# EAGLE board SparkFun_ENS160_BME280_Breakout-Panel (EAGLE 9.6.2), part 1 of 4
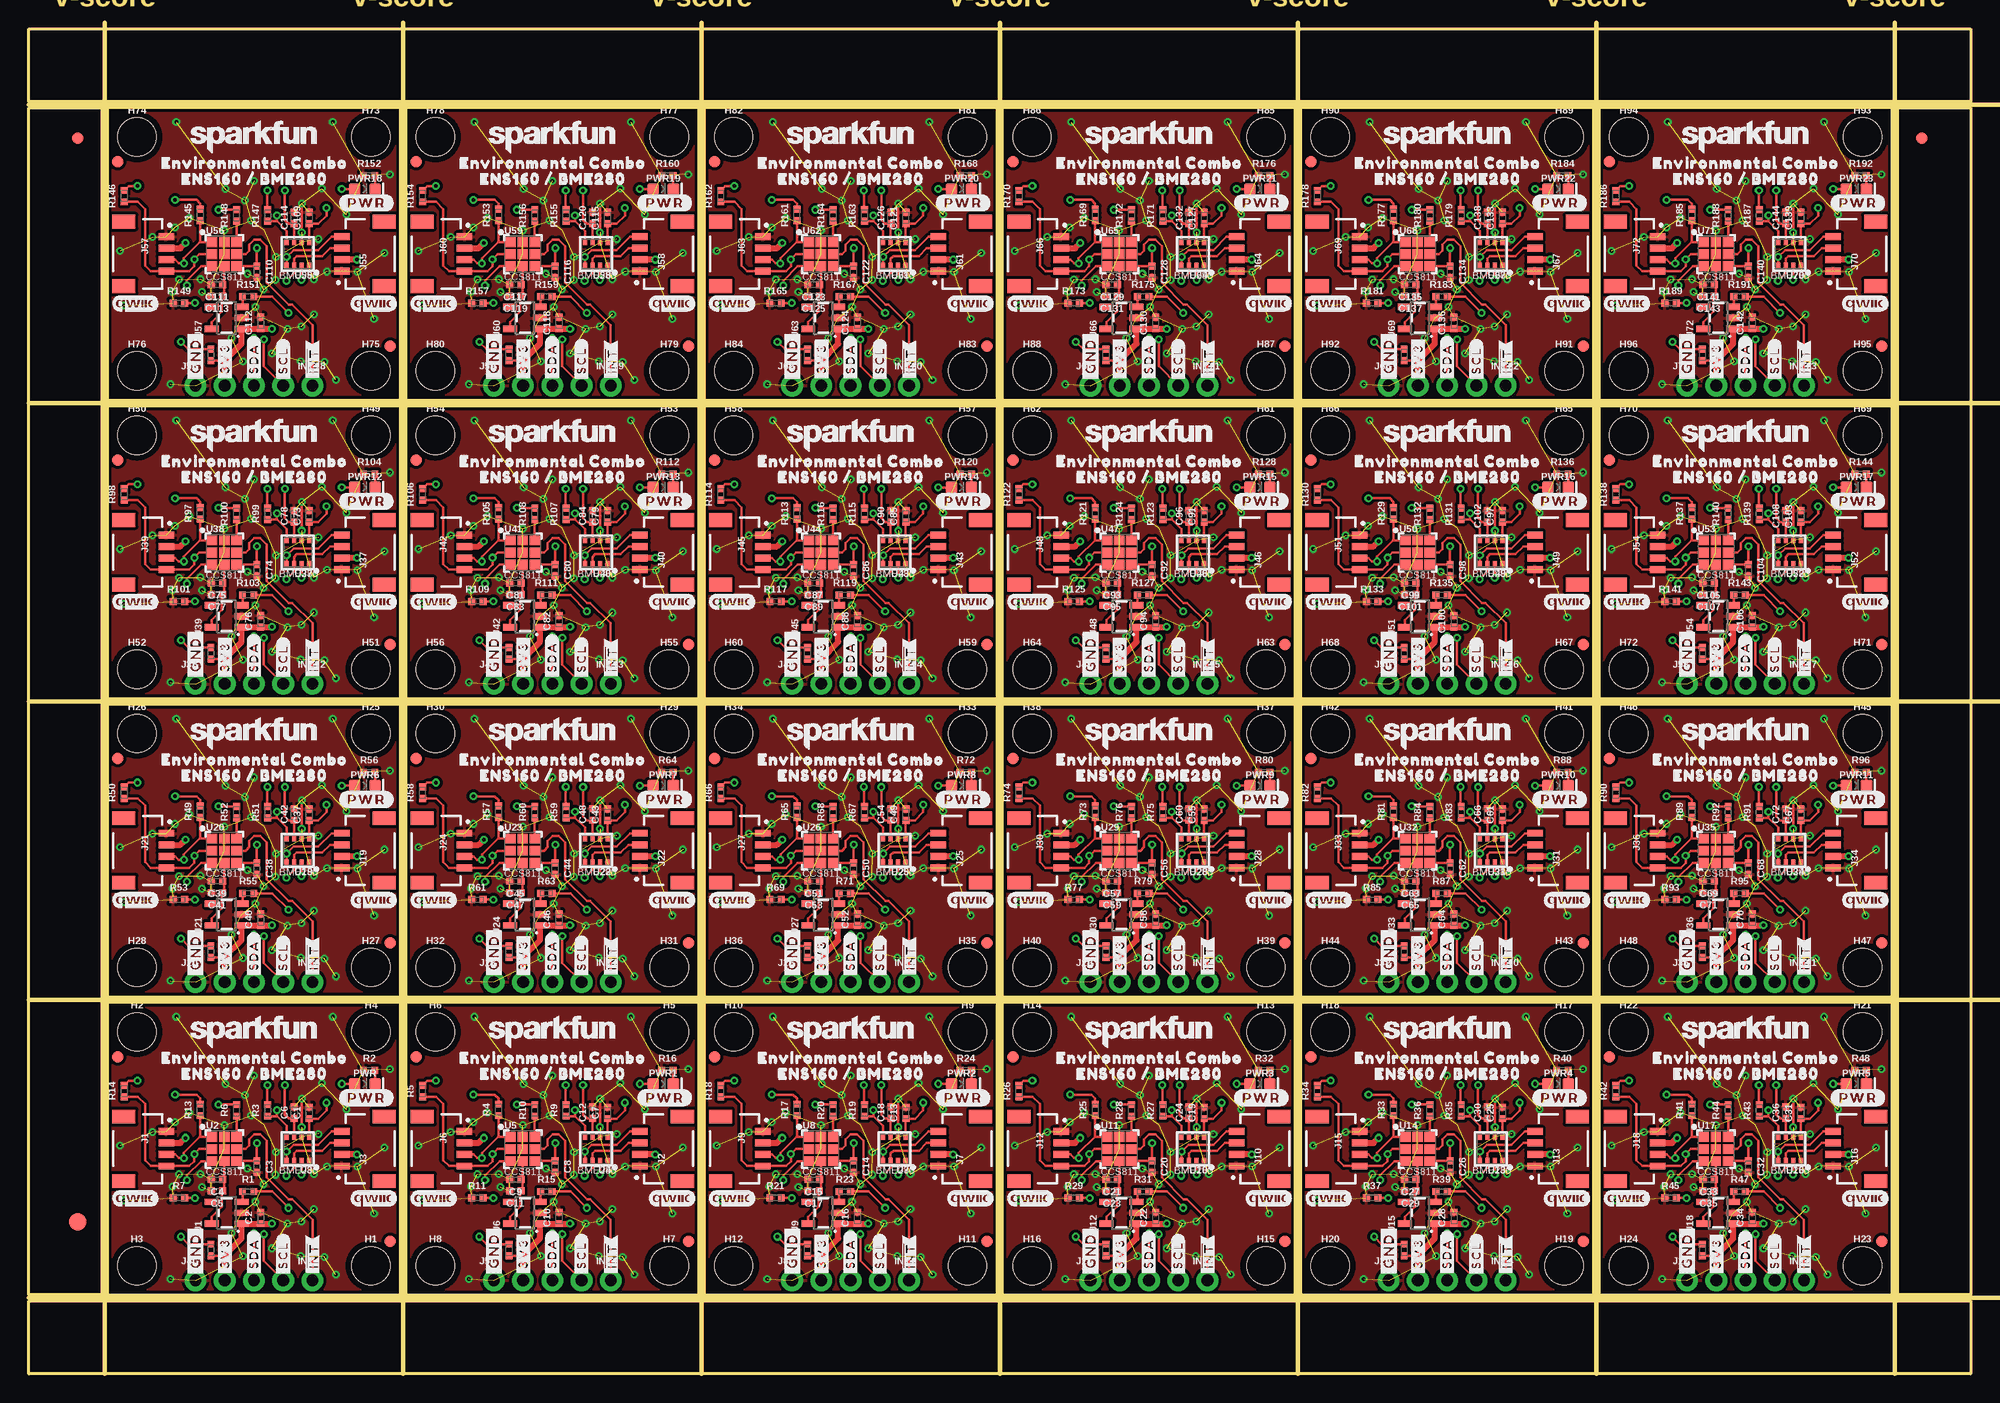
[diagram p0: board, top side]
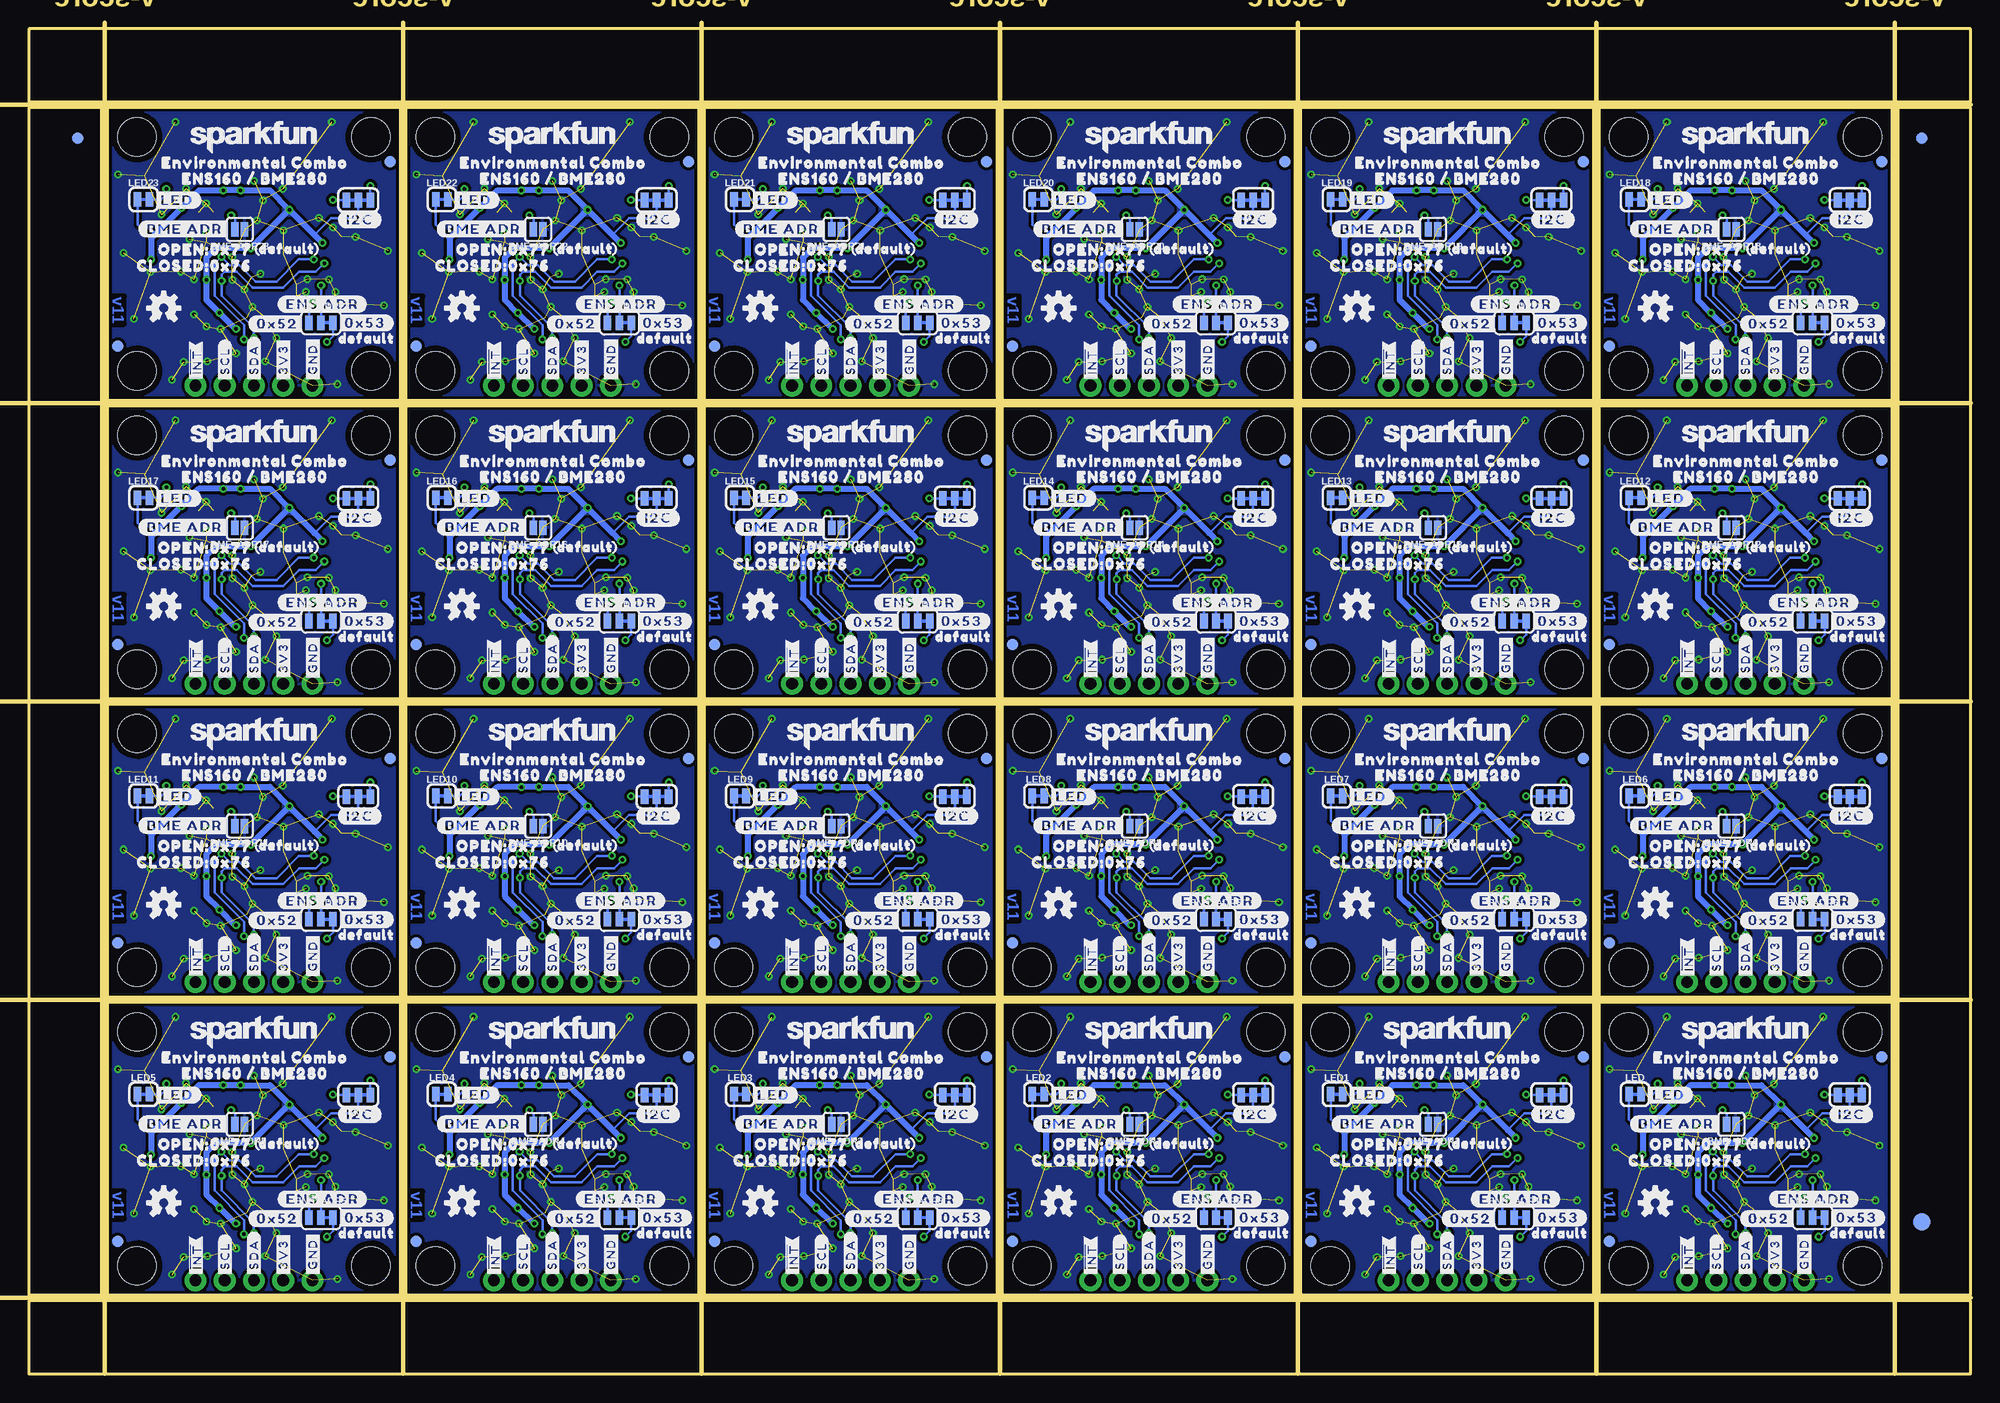
[diagram p1: board, bottom side, seen from below]

Size 168.66 x 116.84 mm. Coordinates in mm from the lower left corner, seen from the top.
Outline: 6.86,6.86 6.86,32.26 32.26,32.26 32.26,6.86 6.86,6.86
Outline: 32.77,6.86 32.77,32.26 58.17,32.26 58.17,6.86 32.77,6.86
Outline: 58.67,6.86 58.67,32.26 84.07,32.26 84.07,6.86 58.67,6.86
Outline: 84.58,6.86 84.58,32.26 109.98,32.26 109.98,6.86 84.58,6.86
Outline: 110.49,6.86 110.49,32.26 135.89,32.26 135.89,6.86 110.49,6.86
Outline: 136.4,6.86 136.4,32.26 161.8,32.26 161.8,6.86 136.4,6.86
Outline: 6.86,32.77 6.86,58.17 32.26,58.17 32.26,32.77 6.86,32.77
Outline: 32.77,32.77 32.77,58.17 58.17,58.17 58.17,32.77 32.77,32.77
Outline: 58.67,32.77 58.67,58.17 84.07,58.17 84.07,32.77 58.67,32.77
Outline: 84.58,32.77 84.58,58.17 109.98,58.17 109.98,32.77 84.58,32.77
Outline: 110.49,32.77 110.49,58.17 135.89,58.17 135.89,32.77 110.49,32.77
Outline: 136.4,32.77 136.4,58.17 161.8,58.17 161.8,32.77 136.4,32.77
Outline: 6.86,58.67 6.86,84.07 32.26,84.07 32.26,58.67 6.86,58.67
Outline: 32.77,58.67 32.77,84.07 58.17,84.07 58.17,58.67 32.77,58.67
Outline: 58.67,58.67 58.67,84.07 84.07,84.07 84.07,58.67 58.67,58.67
Outline: 84.58,58.67 84.58,84.07 109.98,84.07 109.98,58.67 84.58,58.67
Outline: 110.49,58.67 110.49,84.07 135.89,84.07 135.89,58.67 110.49,58.67
Outline: 136.4,58.67 136.4,84.07 161.8,84.07 161.8,58.67 136.4,58.67
Outline: 6.86,84.58 6.86,109.98 32.26,109.98 32.26,84.58 6.86,84.58
Outline: 32.77,84.58 32.77,109.98 58.17,109.98 58.17,84.58 32.77,84.58
Outline: 58.67,84.58 58.67,109.98 84.07,109.98 84.07,84.58 58.67,84.58
Outline: 84.58,84.58 84.58,109.98 109.98,109.98 109.98,84.58 84.58,84.58
Outline: 110.49,84.58 110.49,109.98 135.89,109.98 135.89,84.58 110.49,84.58
Outline: 136.4,84.58 136.4,109.98 161.8,109.98 161.8,84.58 136.4,84.58
Outline: 0,6.35 168.66,6.35 168.66,0 0,0 0,6.35
Outline: 162.31,109.98 168.66,109.98 168.66,6.86 162.31,6.86 162.31,109.98
Outline: 0,116.84 168.66,116.84 168.66,110.49 0,110.49 0,116.84
Outline: 0,109.98 6.35,109.98 6.35,6.86 0,6.86 0,109.98
Copper layers (1*16): Top 0.035mm / dielectric 1.5mm / Bottom 0.035mm
Design rules "SparkFun_ENS160_BME280_Breakout": minimum track width 7mil, minimum drill 0.3mm, track to track 7mil, track to pad 7mil, pad to pad 7mil, via to via 7mil, smd to smd 7mil, copper to edge 7mil, drill to drill 7mil, minimum pad ring 7mil, minimum via ring 7mil, stop-mask expansion 3mil, vias tented up to drill 25mil, thermal gap 10mil
Milling: 12 lines

## Footprints (pad centres in the part's own frame; a part is rotated, then mirrored left to right if it is on the bottom)
SMT-JUMPER_2_NO_SILK = smd 0.635 x 1.27: 1 -0.406,0; 2 0.406,0
0402-TIGHT = smd 0.6 x 0.6: 1 -0.5,0; 2 0.5,0
FIDUCIAL-1X2 = smd 1 x 1: 1 0,0
FIDUCIAL-1.5X3 = smd 1.5 x 1.5: 1 0,0
SMT-JUMPER_3_1-NC_TRACE_SILK = smd 0.66 x 1.27: 1 -1.041,0; 2 0,0; 3 1.041,0
STAND-OFF = hole 3.302: 0,0
SMT-JUMPER_3_2-NC_TRACE_SILK = smd 0.66 x 1.27: 1 -1.041,0; 2 0,0; 3 1.041,0
1X01_NO_SILK_STAND = drill 1.016 pad 1.88: 1 0,0
JST04_1MM_RA = smd 0.6 x 1.35: 1 -1.5,0; 2 -0.5,0; 3 0.5,0; 4 1.5,0 | smd 1.2 x 2: NC1 2.8,-3.675; NC2 -2.8,-3.675
1X04_NO_SILK = drill 1.016 pad 1.88: 1 0,0; 2 2.54,0; 3 5.08,0; 4 7.62,0
SMT-JUMPER_2_NC_TRACE_SILK = smd 0.66 x 1.27: 1 -0.521,0; 2 0.521,0
LED-0603 = smd 1 x 1: A -0.877,0; C 0.877,0
SOT23-5 = smd 0.55 x 1.2: 1 -0.95,-1.3; 2 0,-1.3; 3 0.95,-1.3; 4 0.95,1.3; 5 -0.95,1.3
LGA-9 = smd 0.9 x 0.85: P1 -1.085,1.03; P2 -1.085,-0.02; P3 -1.085,-1.07; P4 -0.035,-1.07; P5 1.015,-1.07; P6 1.015,-0.02; P7 1.015,1.03; P8 -0.035,1.03; P9 -0.035,-0.02
LGA-8-2.5X2.5 = smd 0.35 x 0.5: 1 -0.975,1.025; 2 -0.325,1.025; 3 0.325,1.025; 4 0.975,1.025; 5 0.975,-1.025; 6 0.325,-1.025; 7 -0.325,-1.025; 8 -0.975,-1.025

## Placement (x,y rotation side)
BME_ADR  [SMT-JUMPER_2_NO_SILK]  20.79,21.68 180 bottom
BME_ADR1  [SMT-JUMPER_2_NO_SILK]  46.7,21.68 180 bottom
BME_ADR2  [SMT-JUMPER_2_NO_SILK]  72.61,21.68 180 bottom
BME_ADR3  [SMT-JUMPER_2_NO_SILK]  98.52,21.68 180 bottom
BME_ADR4  [SMT-JUMPER_2_NO_SILK]  124.42,21.68 180 bottom
BME_ADR5  [SMT-JUMPER_2_NO_SILK]  150.33,21.68 180 bottom
BME_ADR6  [SMT-JUMPER_2_NO_SILK]  20.79,47.59 180 bottom
BME_ADR7  [SMT-JUMPER_2_NO_SILK]  46.7,47.59 180 bottom
BME_ADR8  [SMT-JUMPER_2_NO_SILK]  72.61,47.59 180 bottom
BME_ADR9  [SMT-JUMPER_2_NO_SILK]  98.52,47.59 180 bottom
BME_ADR10  [SMT-JUMPER_2_NO_SILK]  124.42,47.59 180 bottom
BME_ADR11  [SMT-JUMPER_2_NO_SILK]  150.33,47.59 180 bottom
BME_ADR12  [SMT-JUMPER_2_NO_SILK]  20.79,73.5 180 bottom
BME_ADR13  [SMT-JUMPER_2_NO_SILK]  46.7,73.5 180 bottom
BME_ADR14  [SMT-JUMPER_2_NO_SILK]  72.61,73.5 180 bottom
BME_ADR15  [SMT-JUMPER_2_NO_SILK]  98.52,73.5 180 bottom
BME_ADR16  [SMT-JUMPER_2_NO_SILK]  124.42,73.5 180 bottom
BME_ADR17  [SMT-JUMPER_2_NO_SILK]  150.33,73.5 180 bottom
BME_ADR18  [SMT-JUMPER_2_NO_SILK]  20.79,99.41 180 bottom
BME_ADR19  [SMT-JUMPER_2_NO_SILK]  46.7,99.41 180 bottom
BME_ADR20  [SMT-JUMPER_2_NO_SILK]  72.61,99.41 180 bottom
BME_ADR21  [SMT-JUMPER_2_NO_SILK]  98.52,99.41 180 bottom
BME_ADR22  [SMT-JUMPER_2_NO_SILK]  124.42,99.41 180 bottom
BME_ADR23  [SMT-JUMPER_2_NO_SILK]  150.33,99.41 180 bottom
C1  0.1uF  [0402-TIGHT]  24.36,22.68 90 top
C2  1.0uF  [0402-TIGHT]  20.15,13.56 90 top
C3  0.1uF  [0402-TIGHT]  19.81,18 270 top
C4  10uF  [0402-TIGHT]  16.34,16.89 180 top
C5  1.0uF  [0402-TIGHT]  16.34,15.89 180 top
C6  0.1uF  [0402-TIGHT]  23.05,22.69 90 top
C7  0.1uF  [0402-TIGHT]  50.27,22.68 90 top
C8  0.1uF  [0402-TIGHT]  45.72,18 270 top
C9  10uF  [0402-TIGHT]  42.25,16.89 180 top
C10  1.0uF  [0402-TIGHT]  46.06,13.56 90 top
C11  1.0uF  [0402-TIGHT]  42.25,15.89 180 top
C12  0.1uF  [0402-TIGHT]  48.96,22.69 90 top
C13  0.1uF  [0402-TIGHT]  76.17,22.68 90 top
C14  0.1uF  [0402-TIGHT]  71.63,18 270 top
C15  10uF  [0402-TIGHT]  68.16,16.89 180 top
C16  1.0uF  [0402-TIGHT]  71.97,13.56 90 top
C17  1.0uF  [0402-TIGHT]  68.16,15.89 180 top
C18  0.1uF  [0402-TIGHT]  74.87,22.69 90 top
C19  0.1uF  [0402-TIGHT]  102.08,22.68 90 top
C20  0.1uF  [0402-TIGHT]  97.54,18 270 top
C21  10uF  [0402-TIGHT]  94.07,16.89 180 top
C22  1.0uF  [0402-TIGHT]  97.88,13.56 90 top
C23  1.0uF  [0402-TIGHT]  94.07,15.89 180 top
C24  0.1uF  [0402-TIGHT]  100.78,22.69 90 top
C25  0.1uF  [0402-TIGHT]  127.99,22.68 90 top
C26  0.1uF  [0402-TIGHT]  123.44,18 270 top
C27  10uF  [0402-TIGHT]  119.98,16.89 180 top
C28  1.0uF  [0402-TIGHT]  123.78,13.56 90 top
C29  1.0uF  [0402-TIGHT]  119.97,15.89 180 top
C30  0.1uF  [0402-TIGHT]  126.69,22.69 90 top
C31  0.1uF  [0402-TIGHT]  153.9,22.68 90 top
C32  0.1uF  [0402-TIGHT]  149.35,18 270 top
C33  10uF  [0402-TIGHT]  145.88,16.89 180 top
C34  1.0uF  [0402-TIGHT]  149.69,13.56 90 top
C35  1.0uF  [0402-TIGHT]  145.88,15.89 180 top
C36  0.1uF  [0402-TIGHT]  152.59,22.69 90 top
C37  0.1uF  [0402-TIGHT]  24.36,48.59 90 top
C38  0.1uF  [0402-TIGHT]  19.81,43.9 270 top
C39  10uF  [0402-TIGHT]  16.34,42.8 180 top
C40  1.0uF  [0402-TIGHT]  20.15,39.47 90 top
C41  1.0uF  [0402-TIGHT]  16.34,41.8 180 top
C42  0.1uF  [0402-TIGHT]  23.05,48.6 90 top
C43  0.1uF  [0402-TIGHT]  50.27,48.59 90 top
C44  0.1uF  [0402-TIGHT]  45.72,43.9 270 top
C45  10uF  [0402-TIGHT]  42.25,42.8 180 top
C46  1.0uF  [0402-TIGHT]  46.06,39.47 90 top
C47  1.0uF  [0402-TIGHT]  42.25,41.8 180 top
C48  0.1uF  [0402-TIGHT]  48.96,48.6 90 top
C49  0.1uF  [0402-TIGHT]  76.17,48.59 90 top
C50  0.1uF  [0402-TIGHT]  71.63,43.9 270 top
C51  10uF  [0402-TIGHT]  68.16,42.8 180 top
C52  1.0uF  [0402-TIGHT]  71.97,39.47 90 top
C53  1.0uF  [0402-TIGHT]  68.16,41.8 180 top
C54  0.1uF  [0402-TIGHT]  74.87,48.6 90 top
C55  0.1uF  [0402-TIGHT]  102.08,48.59 90 top
C56  0.1uF  [0402-TIGHT]  97.54,43.9 270 top
C57  10uF  [0402-TIGHT]  94.07,42.8 180 top
C58  1.0uF  [0402-TIGHT]  97.88,39.47 90 top
C59  1.0uF  [0402-TIGHT]  94.07,41.8 180 top
C60  0.1uF  [0402-TIGHT]  100.78,48.6 90 top
C61  0.1uF  [0402-TIGHT]  127.99,48.59 90 top
C62  0.1uF  [0402-TIGHT]  123.44,43.9 270 top
C63  10uF  [0402-TIGHT]  119.98,42.8 180 top
C64  1.0uF  [0402-TIGHT]  123.78,39.47 90 top
C65  1.0uF  [0402-TIGHT]  119.97,41.8 180 top
C66  0.1uF  [0402-TIGHT]  126.69,48.6 90 top
C67  0.1uF  [0402-TIGHT]  153.9,48.59 90 top
C68  0.1uF  [0402-TIGHT]  149.35,43.9 270 top
C69  10uF  [0402-TIGHT]  145.88,42.8 180 top
C70  1.0uF  [0402-TIGHT]  149.69,39.47 90 top
C71  1.0uF  [0402-TIGHT]  145.88,41.8 180 top
C72  0.1uF  [0402-TIGHT]  152.59,48.6 90 top
C73  0.1uF  [0402-TIGHT]  24.36,74.49 90 top
C74  0.1uF  [0402-TIGHT]  19.81,69.81 270 top
C75  10uF  [0402-TIGHT]  16.34,68.71 180 top
C76  1.0uF  [0402-TIGHT]  20.15,65.38 90 top
C77  1.0uF  [0402-TIGHT]  16.34,67.71 180 top
C78  0.1uF  [0402-TIGHT]  23.05,74.51 90 top
C79  0.1uF  [0402-TIGHT]  50.27,74.49 90 top
C80  0.1uF  [0402-TIGHT]  45.72,69.81 270 top
C81  10uF  [0402-TIGHT]  42.25,68.71 180 top
C82  1.0uF  [0402-TIGHT]  46.06,65.38 90 top
C83  1.0uF  [0402-TIGHT]  42.25,67.71 180 top
C84  0.1uF  [0402-TIGHT]  48.96,74.51 90 top
C85  0.1uF  [0402-TIGHT]  76.17,74.49 90 top
C86  0.1uF  [0402-TIGHT]  71.63,69.81 270 top
C87  10uF  [0402-TIGHT]  68.16,68.71 180 top
C88  1.0uF  [0402-TIGHT]  71.97,65.38 90 top
C89  1.0uF  [0402-TIGHT]  68.16,67.71 180 top
C90  0.1uF  [0402-TIGHT]  74.87,74.51 90 top
C91  0.1uF  [0402-TIGHT]  102.08,74.49 90 top
C92  0.1uF  [0402-TIGHT]  97.54,69.81 270 top
C93  10uF  [0402-TIGHT]  94.07,68.71 180 top
C94  1.0uF  [0402-TIGHT]  97.88,65.38 90 top
C95  1.0uF  [0402-TIGHT]  94.07,67.71 180 top
C96  0.1uF  [0402-TIGHT]  100.78,74.51 90 top
C97  0.1uF  [0402-TIGHT]  127.99,74.49 90 top
C98  0.1uF  [0402-TIGHT]  123.44,69.81 270 top
C99  10uF  [0402-TIGHT]  119.98,68.71 180 top
C100  1.0uF  [0402-TIGHT]  123.78,65.38 90 top
C101  1.0uF  [0402-TIGHT]  119.97,67.71 180 top
C102  0.1uF  [0402-TIGHT]  126.69,74.51 90 top
C103  0.1uF  [0402-TIGHT]  153.9,74.49 90 top
C104  0.1uF  [0402-TIGHT]  149.35,69.81 270 top
C105  10uF  [0402-TIGHT]  145.88,68.71 180 top
C106  1.0uF  [0402-TIGHT]  149.69,65.38 90 top
C107  1.0uF  [0402-TIGHT]  145.88,67.71 180 top
C108  0.1uF  [0402-TIGHT]  152.59,74.51 90 top
C109  0.1uF  [0402-TIGHT]  24.36,100.4 90 top
C110  0.1uF  [0402-TIGHT]  19.81,95.72 270 top
C111  10uF  [0402-TIGHT]  16.34,94.62 180 top
C112  1.0uF  [0402-TIGHT]  20.15,91.28 90 top
C113  1.0uF  [0402-TIGHT]  16.34,93.62 180 top
C114  0.1uF  [0402-TIGHT]  23.05,100.41 90 top
C115  0.1uF  [0402-TIGHT]  50.27,100.4 90 top
C116  0.1uF  [0402-TIGHT]  45.72,95.72 270 top
C117  10uF  [0402-TIGHT]  42.25,94.62 180 top
C118  1.0uF  [0402-TIGHT]  46.06,91.28 90 top
C119  1.0uF  [0402-TIGHT]  42.25,93.62 180 top
C120  0.1uF  [0402-TIGHT]  48.96,100.41 90 top
C121  0.1uF  [0402-TIGHT]  76.17,100.4 90 top
C122  0.1uF  [0402-TIGHT]  71.63,95.72 270 top
C123  10uF  [0402-TIGHT]  68.16,94.62 180 top
C124  1.0uF  [0402-TIGHT]  71.97,91.28 90 top
C125  1.0uF  [0402-TIGHT]  68.16,93.62 180 top
C126  0.1uF  [0402-TIGHT]  74.87,100.41 90 top
C127  0.1uF  [0402-TIGHT]  102.08,100.4 90 top
C128  0.1uF  [0402-TIGHT]  97.54,95.72 270 top
C129  10uF  [0402-TIGHT]  94.07,94.62 180 top
C130  1.0uF  [0402-TIGHT]  97.88,91.28 90 top
C131  1.0uF  [0402-TIGHT]  94.07,93.62 180 top
C132  0.1uF  [0402-TIGHT]  100.78,100.41 90 top
C133  0.1uF  [0402-TIGHT]  127.99,100.4 90 top
C134  0.1uF  [0402-TIGHT]  123.44,95.72 270 top
C135  10uF  [0402-TIGHT]  119.98,94.62 180 top
C136  1.0uF  [0402-TIGHT]  123.78,91.28 90 top
C137  1.0uF  [0402-TIGHT]  119.97,93.62 180 top
C138  0.1uF  [0402-TIGHT]  126.69,100.41 90 top
C139  0.1uF  [0402-TIGHT]  153.9,100.4 90 top
C140  0.1uF  [0402-TIGHT]  149.35,95.72 270 top
C141  10uF  [0402-TIGHT]  145.88,94.62 180 top
C142  1.0uF  [0402-TIGHT]  149.69,91.28 90 top
C143  1.0uF  [0402-TIGHT]  145.88,93.62 180 top
C144  0.1uF  [0402-TIGHT]  152.59,100.41 90 top
E$1  [FIDUCIAL-1X2]  4.23,107.31 0 top
E$2  [FIDUCIAL-1X2]  4.23,107.31 0 bottom
E$3  [FIDUCIAL-1X2]  164.42,107.31 0 top
E$4  [FIDUCIAL-1X2]  164.42,107.31 0 bottom
E$5  [FIDUCIAL-1.5X3]  4.23,13.21 0 top
E$6  [FIDUCIAL-1.5X3]  4.23,13.21 0 bottom
ENS_ADR  JUMPER-SMT_3_1-NC_TRACE_SILK  [SMT-JUMPER_3_1-NC_TRACE_SILK]  13.73,13.58 0 bottom
ENS_ADR1  JUMPER-SMT_3_1-NC_TRACE_SILK  [SMT-JUMPER_3_1-NC_TRACE_SILK]  39.64,13.58 0 bottom
ENS_ADR2  JUMPER-SMT_3_1-NC_TRACE_SILK  [SMT-JUMPER_3_1-NC_TRACE_SILK]  65.55,13.58 0 bottom
ENS_ADR3  JUMPER-SMT_3_1-NC_TRACE_SILK  [SMT-JUMPER_3_1-NC_TRACE_SILK]  91.46,13.58 0 bottom
ENS_ADR4  JUMPER-SMT_3_1-NC_TRACE_SILK  [SMT-JUMPER_3_1-NC_TRACE_SILK]  117.37,13.58 0 bottom
ENS_ADR5  JUMPER-SMT_3_1-NC_TRACE_SILK  [SMT-JUMPER_3_1-NC_TRACE_SILK]  143.27,13.58 0 bottom
ENS_ADR6  JUMPER-SMT_3_1-NC_TRACE_SILK  [SMT-JUMPER_3_1-NC_TRACE_SILK]  13.73,39.49 0 bottom
ENS_ADR7  JUMPER-SMT_3_1-NC_TRACE_SILK  [SMT-JUMPER_3_1-NC_TRACE_SILK]  39.64,39.49 0 bottom
ENS_ADR8  JUMPER-SMT_3_1-NC_TRACE_SILK  [SMT-JUMPER_3_1-NC_TRACE_SILK]  65.55,39.49 0 bottom
ENS_ADR9  JUMPER-SMT_3_1-NC_TRACE_SILK  [SMT-JUMPER_3_1-NC_TRACE_SILK]  91.46,39.49 0 bottom
ENS_ADR10  JUMPER-SMT_3_1-NC_TRACE_SILK  [SMT-JUMPER_3_1-NC_TRACE_SILK]  117.37,39.49 0 bottom
ENS_ADR11  JUMPER-SMT_3_1-NC_TRACE_SILK  [SMT-JUMPER_3_1-NC_TRACE_SILK]  143.27,39.49 0 bottom
ENS_ADR12  JUMPER-SMT_3_1-NC_TRACE_SILK  [SMT-JUMPER_3_1-NC_TRACE_SILK]  13.73,65.4 0 bottom
ENS_ADR13  JUMPER-SMT_3_1-NC_TRACE_SILK  [SMT-JUMPER_3_1-NC_TRACE_SILK]  39.64,65.4 0 bottom
ENS_ADR14  JUMPER-SMT_3_1-NC_TRACE_SILK  [SMT-JUMPER_3_1-NC_TRACE_SILK]  65.55,65.4 0 bottom
ENS_ADR15  JUMPER-SMT_3_1-NC_TRACE_SILK  [SMT-JUMPER_3_1-NC_TRACE_SILK]  91.46,65.4 0 bottom
ENS_ADR16  JUMPER-SMT_3_1-NC_TRACE_SILK  [SMT-JUMPER_3_1-NC_TRACE_SILK]  117.37,65.4 0 bottom
ENS_ADR17  JUMPER-SMT_3_1-NC_TRACE_SILK  [SMT-JUMPER_3_1-NC_TRACE_SILK]  143.27,65.4 0 bottom
ENS_ADR18  JUMPER-SMT_3_1-NC_TRACE_SILK  [SMT-JUMPER_3_1-NC_TRACE_SILK]  13.73,91.31 0 bottom
ENS_ADR19  JUMPER-SMT_3_1-NC_TRACE_SILK  [SMT-JUMPER_3_1-NC_TRACE_SILK]  39.64,91.31 0 bottom
ENS_ADR20  JUMPER-SMT_3_1-NC_TRACE_SILK  [SMT-JUMPER_3_1-NC_TRACE_SILK]  65.55,91.31 0 bottom
ENS_ADR21  JUMPER-SMT_3_1-NC_TRACE_SILK  [SMT-JUMPER_3_1-NC_TRACE_SILK]  91.46,91.31 0 bottom
ENS_ADR22  JUMPER-SMT_3_1-NC_TRACE_SILK  [SMT-JUMPER_3_1-NC_TRACE_SILK]  117.37,91.31 0 bottom
ENS_ADR23  JUMPER-SMT_3_1-NC_TRACE_SILK  [SMT-JUMPER_3_1-NC_TRACE_SILK]  143.27,91.31 0 bottom
FD1  FIDUCIAL1X2  [FIDUCIAL-1X2]  7.74,27.55 0 top
FD2  FIDUCIAL1X2  [FIDUCIAL-1X2]  31.39,11.54 0 top
FD3  FIDUCIAL1X2  [FIDUCIAL-1X2]  31.39,11.54 0 bottom
FD4  FIDUCIAL1X2  [FIDUCIAL-1X2]  7.74,27.55 0 bottom
FD5  FIDUCIAL1X2  [FIDUCIAL-1X2]  33.65,27.55 0 top
FD6  FIDUCIAL1X2  [FIDUCIAL-1X2]  57.3,11.54 0 top
FD7  FIDUCIAL1X2  [FIDUCIAL-1X2]  57.3,11.54 0 bottom
FD8  FIDUCIAL1X2  [FIDUCIAL-1X2]  33.65,27.55 0 bottom
FD9  FIDUCIAL1X2  [FIDUCIAL-1X2]  59.56,27.55 0 top
FD10  FIDUCIAL1X2  [FIDUCIAL-1X2]  83.21,11.54 0 top
FD11  FIDUCIAL1X2  [FIDUCIAL-1X2]  83.21,11.54 0 bottom
FD12  FIDUCIAL1X2  [FIDUCIAL-1X2]  59.56,27.55 0 bottom
FD13  FIDUCIAL1X2  [FIDUCIAL-1X2]  85.47,27.55 0 top
FD14  FIDUCIAL1X2  [FIDUCIAL-1X2]  109.12,11.54 0 top
FD15  FIDUCIAL1X2  [FIDUCIAL-1X2]  109.12,11.54 0 bottom
FD16  FIDUCIAL1X2  [FIDUCIAL-1X2]  85.47,27.55 0 bottom
FD17  FIDUCIAL1X2  [FIDUCIAL-1X2]  111.37,27.55 0 top
FD18  FIDUCIAL1X2  [FIDUCIAL-1X2]  135.02,11.54 0 top
FD19  FIDUCIAL1X2  [FIDUCIAL-1X2]  135.02,11.54 0 bottom
FD20  FIDUCIAL1X2  [FIDUCIAL-1X2]  111.37,27.55 0 bottom
FD21  FIDUCIAL1X2  [FIDUCIAL-1X2]  137.28,27.55 0 top
FD22  FIDUCIAL1X2  [FIDUCIAL-1X2]  160.93,11.54 0 top
FD23  FIDUCIAL1X2  [FIDUCIAL-1X2]  160.93,11.54 0 bottom
FD24  FIDUCIAL1X2  [FIDUCIAL-1X2]  137.28,27.55 0 bottom
FD25  FIDUCIAL1X2  [FIDUCIAL-1X2]  7.74,53.46 0 top
FD26  FIDUCIAL1X2  [FIDUCIAL-1X2]  31.39,37.45 0 top
FD27  FIDUCIAL1X2  [FIDUCIAL-1X2]  31.39,37.45 0 bottom
FD28  FIDUCIAL1X2  [FIDUCIAL-1X2]  7.74,53.46 0 bottom
FD29  FIDUCIAL1X2  [FIDUCIAL-1X2]  33.65,53.46 0 top
FD30  FIDUCIAL1X2  [FIDUCIAL-1X2]  57.3,37.45 0 top
FD31  FIDUCIAL1X2  [FIDUCIAL-1X2]  57.3,37.45 0 bottom
FD32  FIDUCIAL1X2  [FIDUCIAL-1X2]  33.65,53.46 0 bottom
FD33  FIDUCIAL1X2  [FIDUCIAL-1X2]  59.56,53.46 0 top
FD34  FIDUCIAL1X2  [FIDUCIAL-1X2]  83.21,37.45 0 top
FD35  FIDUCIAL1X2  [FIDUCIAL-1X2]  83.21,37.45 0 bottom
FD36  FIDUCIAL1X2  [FIDUCIAL-1X2]  59.56,53.46 0 bottom
FD37  FIDUCIAL1X2  [FIDUCIAL-1X2]  85.47,53.46 0 top
FD38  FIDUCIAL1X2  [FIDUCIAL-1X2]  109.12,37.45 0 top
FD39  FIDUCIAL1X2  [FIDUCIAL-1X2]  109.12,37.45 0 bottom
FD40  FIDUCIAL1X2  [FIDUCIAL-1X2]  85.47,53.46 0 bottom
FD41  FIDUCIAL1X2  [FIDUCIAL-1X2]  111.37,53.46 0 top
FD42  FIDUCIAL1X2  [FIDUCIAL-1X2]  135.02,37.45 0 top
FD43  FIDUCIAL1X2  [FIDUCIAL-1X2]  135.02,37.45 0 bottom
FD44  FIDUCIAL1X2  [FIDUCIAL-1X2]  111.37,53.46 0 bottom
FD45  FIDUCIAL1X2  [FIDUCIAL-1X2]  137.28,53.46 0 top
FD46  FIDUCIAL1X2  [FIDUCIAL-1X2]  160.93,37.45 0 top
FD47  FIDUCIAL1X2  [FIDUCIAL-1X2]  160.93,37.45 0 bottom
FD48  FIDUCIAL1X2  [FIDUCIAL-1X2]  137.28,53.46 0 bottom
FD49  FIDUCIAL1X2  [FIDUCIAL-1X2]  7.74,79.37 0 top
FD50  FIDUCIAL1X2  [FIDUCIAL-1X2]  31.39,63.36 0 top
FD51  FIDUCIAL1X2  [FIDUCIAL-1X2]  31.39,63.36 0 bottom
FD52  FIDUCIAL1X2  [FIDUCIAL-1X2]  7.74,79.37 0 bottom
FD53  FIDUCIAL1X2  [FIDUCIAL-1X2]  33.65,79.37 0 top
FD54  FIDUCIAL1X2  [FIDUCIAL-1X2]  57.3,63.36 0 top
FD55  FIDUCIAL1X2  [FIDUCIAL-1X2]  57.3,63.36 0 bottom
FD56  FIDUCIAL1X2  [FIDUCIAL-1X2]  33.65,79.37 0 bottom
FD57  FIDUCIAL1X2  [FIDUCIAL-1X2]  59.56,79.37 0 top
FD58  FIDUCIAL1X2  [FIDUCIAL-1X2]  83.21,63.36 0 top
FD59  FIDUCIAL1X2  [FIDUCIAL-1X2]  83.21,63.36 0 bottom
FD60  FIDUCIAL1X2  [FIDUCIAL-1X2]  59.56,79.37 0 bottom
FD61  FIDUCIAL1X2  [FIDUCIAL-1X2]  85.47,79.37 0 top
FD62  FIDUCIAL1X2  [FIDUCIAL-1X2]  109.12,63.36 0 top
FD63  FIDUCIAL1X2  [FIDUCIAL-1X2]  109.12,63.36 0 bottom
FD64  FIDUCIAL1X2  [FIDUCIAL-1X2]  85.47,79.37 0 bottom
FD65  FIDUCIAL1X2  [FIDUCIAL-1X2]  111.37,79.37 0 top
FD66  FIDUCIAL1X2  [FIDUCIAL-1X2]  135.02,63.36 0 top
FD67  FIDUCIAL1X2  [FIDUCIAL-1X2]  135.02,63.36 0 bottom
FD68  FIDUCIAL1X2  [FIDUCIAL-1X2]  111.37,79.37 0 bottom
FD69  FIDUCIAL1X2  [FIDUCIAL-1X2]  137.28,79.37 0 top
FD70  FIDUCIAL1X2  [FIDUCIAL-1X2]  160.93,63.36 0 top
FD71  FIDUCIAL1X2  [FIDUCIAL-1X2]  160.93,63.36 0 bottom
FD72  FIDUCIAL1X2  [FIDUCIAL-1X2]  137.28,79.37 0 bottom
FD73  FIDUCIAL1X2  [FIDUCIAL-1X2]  7.74,105.28 0 top
FD74  FIDUCIAL1X2  [FIDUCIAL-1X2]  31.39,89.26 0 top
FD75  FIDUCIAL1X2  [FIDUCIAL-1X2]  31.39,89.26 0 bottom
FD76  FIDUCIAL1X2  [FIDUCIAL-1X2]  7.74,105.28 0 bottom
FD77  FIDUCIAL1X2  [FIDUCIAL-1X2]  33.65,105.28 0 top
FD78  FIDUCIAL1X2  [FIDUCIAL-1X2]  57.3,89.26 0 top
FD79  FIDUCIAL1X2  [FIDUCIAL-1X2]  57.3,89.26 0 bottom
FD80  FIDUCIAL1X2  [FIDUCIAL-1X2]  33.65,105.28 0 bottom
FD81  FIDUCIAL1X2  [FIDUCIAL-1X2]  59.56,105.28 0 top
FD82  FIDUCIAL1X2  [FIDUCIAL-1X2]  83.21,89.26 0 top
FD83  FIDUCIAL1X2  [FIDUCIAL-1X2]  83.21,89.26 0 bottom
FD84  FIDUCIAL1X2  [FIDUCIAL-1X2]  59.56,105.28 0 bottom
FD85  FIDUCIAL1X2  [FIDUCIAL-1X2]  85.47,105.28 0 top
FD86  FIDUCIAL1X2  [FIDUCIAL-1X2]  109.12,89.26 0 top
FD87  FIDUCIAL1X2  [FIDUCIAL-1X2]  109.12,89.26 0 bottom
FD88  FIDUCIAL1X2  [FIDUCIAL-1X2]  85.47,105.28 0 bottom
FD89  FIDUCIAL1X2  [FIDUCIAL-1X2]  111.37,105.28 0 top
FD90  FIDUCIAL1X2  [FIDUCIAL-1X2]  135.02,89.26 0 top
FD91  FIDUCIAL1X2  [FIDUCIAL-1X2]  135.02,89.26 0 bottom
FD92  FIDUCIAL1X2  [FIDUCIAL-1X2]  111.37,105.28 0 bottom
FD93  FIDUCIAL1X2  [FIDUCIAL-1X2]  137.28,105.28 0 top
FD94  FIDUCIAL1X2  [FIDUCIAL-1X2]  160.93,89.26 0 top
FD95  FIDUCIAL1X2  [FIDUCIAL-1X2]  160.93,89.26 0 bottom
FD96  FIDUCIAL1X2  [FIDUCIAL-1X2]  137.28,105.28 0 bottom
H1  STAND-OFF  [STAND-OFF]  29.72,9.4 0 top
H2  STAND-OFF  [STAND-OFF]  9.4,29.72 0 top
H3  STAND-OFF  [STAND-OFF]  9.4,9.4 0 top
H4  STAND-OFF  [STAND-OFF]  29.72,29.72 0 top
H5  STAND-OFF  [STAND-OFF]  55.63,29.72 0 top
H6  STAND-OFF  [STAND-OFF]  35.31,29.72 0 top
H7  STAND-OFF  [STAND-OFF]  55.63,9.4 0 top
H8  STAND-OFF  [STAND-OFF]  35.31,9.4 0 top
H9  STAND-OFF  [STAND-OFF]  81.53,29.72 0 top
H10  STAND-OFF  [STAND-OFF]  61.21,29.72 0 top
H11  STAND-OFF  [STAND-OFF]  81.53,9.4 0 top
H12  STAND-OFF  [STAND-OFF]  61.21,9.4 0 top
H13  STAND-OFF  [STAND-OFF]  107.44,29.72 0 top
H14  STAND-OFF  [STAND-OFF]  87.12,29.72 0 top
H15  STAND-OFF  [STAND-OFF]  107.44,9.4 0 top
H16  STAND-OFF  [STAND-OFF]  87.12,9.4 0 top
H17  STAND-OFF  [STAND-OFF]  133.35,29.72 0 top
H18  STAND-OFF  [STAND-OFF]  113.03,29.72 0 top
H19  STAND-OFF  [STAND-OFF]  133.35,9.4 0 top
H20  STAND-OFF  [STAND-OFF]  113.03,9.4 0 top
H21  STAND-OFF  [STAND-OFF]  159.26,29.72 0 top
H22  STAND-OFF  [STAND-OFF]  138.94,29.72 0 top
H23  STAND-OFF  [STAND-OFF]  159.26,9.4 0 top
H24  STAND-OFF  [STAND-OFF]  138.94,9.4 0 top
H25  STAND-OFF  [STAND-OFF]  29.72,55.63 0 top
H26  STAND-OFF  [STAND-OFF]  9.4,55.63 0 top
H27  STAND-OFF  [STAND-OFF]  29.72,35.31 0 top
H28  STAND-OFF  [STAND-OFF]  9.4,35.31 0 top
H29  STAND-OFF  [STAND-OFF]  55.63,55.63 0 top
H30  STAND-OFF  [STAND-OFF]  35.31,55.63 0 top
H31  STAND-OFF  [STAND-OFF]  55.63,35.31 0 top
H32  STAND-OFF  [STAND-OFF]  35.31,35.31 0 top
H33  STAND-OFF  [STAND-OFF]  81.53,55.63 0 top
H34  STAND-OFF  [STAND-OFF]  61.21,55.63 0 top
H35  STAND-OFF  [STAND-OFF]  81.53,35.31 0 top
H36  STAND-OFF  [STAND-OFF]  61.21,35.31 0 top
H37  STAND-OFF  [STAND-OFF]  107.44,55.63 0 top
H38  STAND-OFF  [STAND-OFF]  87.12,55.63 0 top
H39  STAND-OFF  [STAND-OFF]  107.44,35.31 0 top
H40  STAND-OFF  [STAND-OFF]  87.12,35.31 0 top
H41  STAND-OFF  [STAND-OFF]  133.35,55.63 0 top
H42  STAND-OFF  [STAND-OFF]  113.03,55.63 0 top
H43  STAND-OFF  [STAND-OFF]  133.35,35.31 0 top
H44  STAND-OFF  [STAND-OFF]  113.03,35.31 0 top
H45  STAND-OFF  [STAND-OFF]  159.26,55.63 0 top
H46  STAND-OFF  [STAND-OFF]  138.94,55.63 0 top
H47  STAND-OFF  [STAND-OFF]  159.26,35.31 0 top
H48  STAND-OFF  [STAND-OFF]  138.94,35.31 0 top
H49  STAND-OFF  [STAND-OFF]  29.72,81.53 0 top
H50  STAND-OFF  [STAND-OFF]  9.4,81.53 0 top
H51  STAND-OFF  [STAND-OFF]  29.72,61.21 0 top
H52  STAND-OFF  [STAND-OFF]  9.4,61.21 0 top
H53  STAND-OFF  [STAND-OFF]  55.63,81.53 0 top
H54  STAND-OFF  [STAND-OFF]  35.31,81.53 0 top
H55  STAND-OFF  [STAND-OFF]  55.63,61.21 0 top
H56  STAND-OFF  [STAND-OFF]  35.31,61.21 0 top
H57  STAND-OFF  [STAND-OFF]  81.53,81.53 0 top
H58  STAND-OFF  [STAND-OFF]  61.21,81.53 0 top
H59  STAND-OFF  [STAND-OFF]  81.53,61.21 0 top
H60  STAND-OFF  [STAND-OFF]  61.21,61.21 0 top
H61  STAND-OFF  [STAND-OFF]  107.44,81.53 0 top
H62  STAND-OFF  [STAND-OFF]  87.12,81.53 0 top
H63  STAND-OFF  [STAND-OFF]  107.44,61.21 0 top
H64  STAND-OFF  [STAND-OFF]  87.12,61.21 0 top
H65  STAND-OFF  [STAND-OFF]  133.35,81.53 0 top
H66  STAND-OFF  [STAND-OFF]  113.03,81.53 0 top
H67  STAND-OFF  [STAND-OFF]  133.35,61.21 0 top
H68  STAND-OFF  [STAND-OFF]  113.03,61.21 0 top
H69  STAND-OFF  [STAND-OFF]  159.26,81.53 0 top
H70  STAND-OFF  [STAND-OFF]  138.94,81.53 0 top
H71  STAND-OFF  [STAND-OFF]  159.26,61.21 0 top
H72  STAND-OFF  [STAND-OFF]  138.94,61.21 0 top
H73  STAND-OFF  [STAND-OFF]  29.72,107.44 0 top
H74  STAND-OFF  [STAND-OFF]  9.4,107.44 0 top
H75  STAND-OFF  [STAND-OFF]  29.72,87.12 0 top
H76  STAND-OFF  [STAND-OFF]  9.4,87.12 0 top
H77  STAND-OFF  [STAND-OFF]  55.63,107.44 0 top
H78  STAND-OFF  [STAND-OFF]  35.31,107.44 0 top
H79  STAND-OFF  [STAND-OFF]  55.63,87.12 0 top
H80  STAND-OFF  [STAND-OFF]  35.31,87.12 0 top
H81  STAND-OFF  [STAND-OFF]  81.53,107.44 0 top
H82  STAND-OFF  [STAND-OFF]  61.21,107.44 0 top
H83  STAND-OFF  [STAND-OFF]  81.53,87.12 0 top
H84  STAND-OFF  [STAND-OFF]  61.21,87.12 0 top
H85  STAND-OFF  [STAND-OFF]  107.44,107.44 0 top
H86  STAND-OFF  [STAND-OFF]  87.12,107.44 0 top
H87  STAND-OFF  [STAND-OFF]  107.44,87.12 0 top
H88  STAND-OFF  [STAND-OFF]  87.12,87.12 0 top
H89  STAND-OFF  [STAND-OFF]  133.35,107.44 0 top
H90  STAND-OFF  [STAND-OFF]  113.03,107.44 0 top
H91  STAND-OFF  [STAND-OFF]  133.35,87.12 0 top
H92  STAND-OFF  [STAND-OFF]  113.03,87.12 0 top
H93  STAND-OFF  [STAND-OFF]  159.26,107.44 0 top
H94  STAND-OFF  [STAND-OFF]  138.94,107.44 0 top
H95  STAND-OFF  [STAND-OFF]  159.26,87.12 0 top
H96  STAND-OFF  [STAND-OFF]  138.94,87.12 0 top
I2C  [SMT-JUMPER_3_2-NC_TRACE_SILK]  10.5,24.23 180 bottom
I2C1  [SMT-JUMPER_3_2-NC_TRACE_SILK]  36.41,24.23 180 bottom
I2C2  [SMT-JUMPER_3_2-NC_TRACE_SILK]  62.32,24.23 180 bottom
I2C3  [SMT-JUMPER_3_2-NC_TRACE_SILK]  88.23,24.23 180 bottom
I2C4  [SMT-JUMPER_3_2-NC_TRACE_SILK]  114.13,24.23 180 bottom
I2C5  [SMT-JUMPER_3_2-NC_TRACE_SILK]  140.04,24.23 180 bottom
I2C6  [SMT-JUMPER_3_2-NC_TRACE_SILK]  10.5,50.14 180 bottom
I2C7  [SMT-JUMPER_3_2-NC_TRACE_SILK]  36.41,50.14 180 bottom
I2C8  [SMT-JUMPER_3_2-NC_TRACE_SILK]  62.32,50.14 180 bottom
I2C9  [SMT-JUMPER_3_2-NC_TRACE_SILK]  88.23,50.14 180 bottom
I2C10  [SMT-JUMPER_3_2-NC_TRACE_SILK]  114.13,50.14 180 bottom
I2C11  [SMT-JUMPER_3_2-NC_TRACE_SILK]  140.04,50.14 180 bottom
I2C12  [SMT-JUMPER_3_2-NC_TRACE_SILK]  10.5,76.05 180 bottom
I2C13  [SMT-JUMPER_3_2-NC_TRACE_SILK]  36.41,76.05 180 bottom
I2C14  [SMT-JUMPER_3_2-NC_TRACE_SILK]  62.32,76.05 180 bottom
I2C15  [SMT-JUMPER_3_2-NC_TRACE_SILK]  88.23,76.05 180 bottom
I2C16  [SMT-JUMPER_3_2-NC_TRACE_SILK]  114.13,76.05 180 bottom
I2C17  [SMT-JUMPER_3_2-NC_TRACE_SILK]  140.04,76.05 180 bottom
I2C18  [SMT-JUMPER_3_2-NC_TRACE_SILK]  10.5,101.96 180 bottom
I2C19  [SMT-JUMPER_3_2-NC_TRACE_SILK]  36.41,101.96 180 bottom
I2C20  [SMT-JUMPER_3_2-NC_TRACE_SILK]  62.32,101.96 180 bottom
I2C21  [SMT-JUMPER_3_2-NC_TRACE_SILK]  88.23,101.96 180 bottom
I2C22  [SMT-JUMPER_3_2-NC_TRACE_SILK]  114.13,101.96 180 bottom
I2C23  [SMT-JUMPER_3_2-NC_TRACE_SILK]  140.04,101.96 180 bottom
INT  [1X01_NO_SILK_STAND]  24.64,8.13 0 top
INT1  [1X01_NO_SILK_STAND]  50.55,8.13 0 top
INT2  [1X01_NO_SILK_STAND]  76.45,8.13 0 top
INT3  [1X01_NO_SILK_STAND]  102.36,8.13 0 top
INT4  [1X01_NO_SILK_STAND]  128.27,8.13 0 top
INT5  [1X01_NO_SILK_STAND]  154.18,8.13 0 top
INT6  [1X01_NO_SILK_STAND]  24.64,34.04 0 top
INT7  [1X01_NO_SILK_STAND]  50.55,34.04 0 top
INT8  [1X01_NO_SILK_STAND]  76.45,34.04 0 top
INT9  [1X01_NO_SILK_STAND]  102.36,34.04 0 top
INT10  [1X01_NO_SILK_STAND]  128.27,34.04 0 top
INT11  [1X01_NO_SILK_STAND]  154.18,34.04 0 top
INT12  [1X01_NO_SILK_STAND]  24.64,59.94 0 top
INT13  [1X01_NO_SILK_STAND]  50.55,59.94 0 top
INT14  [1X01_NO_SILK_STAND]  76.45,59.94 0 top
INT15  [1X01_NO_SILK_STAND]  102.36,59.94 0 top
INT16  [1X01_NO_SILK_STAND]  128.27,59.94 0 top
INT17  [1X01_NO_SILK_STAND]  154.18,59.94 0 top
INT18  [1X01_NO_SILK_STAND]  24.64,85.85 0 top
INT19  [1X01_NO_SILK_STAND]  50.55,85.85 0 top
INT20  [1X01_NO_SILK_STAND]  76.45,85.85 0 top
INT21  [1X01_NO_SILK_STAND]  102.36,85.85 0 top
INT22  [1X01_NO_SILK_STAND]  128.27,85.85 0 top
INT23  [1X01_NO_SILK_STAND]  154.18,85.85 0 top
J1  Qwiic Right Angle  [JST04_1MM_RA]  11.94,19.56 270 top
J2  Qwiic Right Angle  [JST04_1MM_RA]  53.09,19.56 90 top
J3  Qwiic Right Angle  [JST04_1MM_RA]  27.18,19.56 90 top
J4  PTH  [1X04_NO_SILK]  14.48,8.13 0 top
J5  PTH  [1X04_NO_SILK]  40.39,8.13 0 top
J6  Qwiic Right Angle  [JST04_1MM_RA]  37.85,19.56 270 top
J7  Qwiic Right Angle  [JST04_1MM_RA]  78.99,19.56 90 top
J8  PTH  [1X04_NO_SILK]  66.29,8.13 0 top
J9  Qwiic Right Angle  [JST04_1MM_RA]  63.75,19.56 270 top
J10  Qwiic Right Angle  [JST04_1MM_RA]  104.9,19.56 90 top
J11  PTH  [1X04_NO_SILK]  92.2,8.13 0 top
J12  Qwiic Right Angle  [JST04_1MM_RA]  89.66,19.56 270 top
J13  Qwiic Right Angle  [JST04_1MM_RA]  130.81,19.56 90 top
J14  PTH  [1X04_NO_SILK]  118.11,8.13 0 top
J15  Qwiic Right Angle  [JST04_1MM_RA]  115.57,19.56 270 top
J16  Qwiic Right Angle  [JST04_1MM_RA]  156.72,19.56 90 top
J17  PTH  [1X04_NO_SILK]  144.02,8.13 0 top
J18  Qwiic Right Angle  [JST04_1MM_RA]  141.48,19.56 270 top
J19  Qwiic Right Angle  [JST04_1MM_RA]  27.18,45.47 90 top
J20  PTH  [1X04_NO_SILK]  14.48,34.04 0 top
J21  Qwiic Right Angle  [JST04_1MM_RA]  11.94,45.47 270 top
J22  Qwiic Right Angle  [JST04_1MM_RA]  53.09,45.47 90 top
J23  PTH  [1X04_NO_SILK]  40.39,34.04 0 top
J24  Qwiic Right Angle  [JST04_1MM_RA]  37.85,45.47 270 top
J25  Qwiic Right Angle  [JST04_1MM_RA]  78.99,45.47 90 top
J26  PTH  [1X04_NO_SILK]  66.29,34.04 0 top
J27  Qwiic Right Angle  [JST04_1MM_RA]  63.75,45.47 270 top
J28  Qwiic Right Angle  [JST04_1MM_RA]  104.9,45.47 90 top
J29  PTH  [1X04_NO_SILK]  92.2,34.04 0 top
J30  Qwiic Right Angle  [JST04_1MM_RA]  89.66,45.47 270 top
J31  Qwiic Right Angle  [JST04_1MM_RA]  130.81,45.47 90 top
J32  PTH  [1X04_NO_SILK]  118.11,34.04 0 top
J33  Qwiic Right Angle  [JST04_1MM_RA]  115.57,45.47 270 top
J34  Qwiic Right Angle  [JST04_1MM_RA]  156.72,45.47 90 top
J35  PTH  [1X04_NO_SILK]  144.02,34.04 0 top
J36  Qwiic Right Angle  [JST04_1MM_RA]  141.48,45.47 270 top
J37  Qwiic Right Angle  [JST04_1MM_RA]  27.18,71.37 90 top
J38  PTH  [1X04_NO_SILK]  14.48,59.94 0 top
J39  Qwiic Right Angle  [JST04_1MM_RA]  11.94,71.37 270 top
J40  Qwiic Right Angle  [JST04_1MM_RA]  53.09,71.37 90 top
J41  PTH  [1X04_NO_SILK]  40.39,59.94 0 top
J42  Qwiic Right Angle  [JST04_1MM_RA]  37.85,71.37 270 top
J43  Qwiic Right Angle  [JST04_1MM_RA]  78.99,71.37 90 top
J44  PTH  [1X04_NO_SILK]  66.29,59.94 0 top
J45  Qwiic Right Angle  [JST04_1MM_RA]  63.75,71.37 270 top
J46  Qwiic Right Angle  [JST04_1MM_RA]  104.9,71.37 90 top
J47  PTH  [1X04_NO_SILK]  92.2,59.94 0 top
J48  Qwiic Right Angle  [JST04_1MM_RA]  89.66,71.37 270 top
J49  Qwiic Right Angle  [JST04_1MM_RA]  130.81,71.37 90 top
J50  PTH  [1X04_NO_SILK]  118.11,59.94 0 top
J51  Qwiic Right Angle  [JST04_1MM_RA]  115.57,71.37 270 top
J52  Qwiic Right Angle  [JST04_1MM_RA]  156.72,71.37 90 top
J53  PTH  [1X04_NO_SILK]  144.02,59.94 0 top
J54  Qwiic Right Angle  [JST04_1MM_RA]  141.48,71.37 270 top
J55  Qwiic Right Angle  [JST04_1MM_RA]  27.18,97.28 90 top
J56  PTH  [1X04_NO_SILK]  14.48,85.85 0 top
J57  Qwiic Right Angle  [JST04_1MM_RA]  11.94,97.28 270 top
J58  Qwiic Right Angle  [JST04_1MM_RA]  53.09,97.28 90 top
J59  PTH  [1X04_NO_SILK]  40.39,85.85 0 top
J60  Qwiic Right Angle  [JST04_1MM_RA]  37.85,97.28 270 top
J61  Qwiic Right Angle  [JST04_1MM_RA]  78.99,97.28 90 top
J62  PTH  [1X04_NO_SILK]  66.29,85.85 0 top
J63  Qwiic Right Angle  [JST04_1MM_RA]  63.75,97.28 270 top
J64  Qwiic Right Angle  [JST04_1MM_RA]  104.9,97.28 90 top
J65  PTH  [1X04_NO_SILK]  92.2,85.85 0 top
J66  Qwiic Right Angle  [JST04_1MM_RA]  89.66,97.28 270 top
J67  Qwiic Right Angle  [JST04_1MM_RA]  130.81,97.28 90 top
J68  PTH  [1X04_NO_SILK]  118.11,85.85 0 top
J69  Qwiic Right Angle  [JST04_1MM_RA]  115.57,97.28 270 top
J70  Qwiic Right Angle  [JST04_1MM_RA]  156.72,97.28 90 top
J71  PTH  [1X04_NO_SILK]  144.02,85.85 0 top
J72  Qwiic Right Angle  [JST04_1MM_RA]  141.48,97.28 270 top
LED  [SMT-JUMPER_2_NC_TRACE_SILK]  29.15,24.29 0 bottom
LED1  [SMT-JUMPER_2_NC_TRACE_SILK]  55.06,24.29 0 bottom
LED2  [SMT-JUMPER_2_NC_TRACE_SILK]  80.97,24.29 0 bottom
LED3  [SMT-JUMPER_2_NC_TRACE_SILK]  106.88,24.29 0 bottom
LED4  [SMT-JUMPER_2_NC_TRACE_SILK]  132.79,24.29 0 bottom
LED5  [SMT-JUMPER_2_NC_TRACE_SILK]  158.69,24.29 0 bottom
LED6  [SMT-JUMPER_2_NC_TRACE_SILK]  29.15,50.2 0 bottom
LED7  [SMT-JUMPER_2_NC_TRACE_SILK]  55.06,50.2 0 bottom
LED8  [SMT-JUMPER_2_NC_TRACE_SILK]  80.97,50.2 0 bottom
LED9  [SMT-JUMPER_2_NC_TRACE_SILK]  106.88,50.2 0 bottom
LED10  [SMT-JUMPER_2_NC_TRACE_SILK]  132.79,50.2 0 bottom
LED11  [SMT-JUMPER_2_NC_TRACE_SILK]  158.69,50.2 0 bottom
LED12  [SMT-JUMPER_2_NC_TRACE_SILK]  29.15,76.11 0 bottom
LED13  [SMT-JUMPER_2_NC_TRACE_SILK]  55.06,76.11 0 bottom
LED14  [SMT-JUMPER_2_NC_TRACE_SILK]  80.97,76.11 0 bottom
LED15  [SMT-JUMPER_2_NC_TRACE_SILK]  106.88,76.11 0 bottom
LED16  [SMT-JUMPER_2_NC_TRACE_SILK]  132.79,76.11 0 bottom
LED17  [SMT-JUMPER_2_NC_TRACE_SILK]  158.69,76.11 0 bottom
LED18  [SMT-JUMPER_2_NC_TRACE_SILK]  29.15,102.02 0 bottom
LED19  [SMT-JUMPER_2_NC_TRACE_SILK]  55.06,102.02 0 bottom
LED20  [SMT-JUMPER_2_NC_TRACE_SILK]  80.97,102.02 0 bottom
LED21  [SMT-JUMPER_2_NC_TRACE_SILK]  106.88,102.02 0 bottom
LED22  [SMT-JUMPER_2_NC_TRACE_SILK]  132.79,102.02 0 bottom
LED23  [SMT-JUMPER_2_NC_TRACE_SILK]  158.69,102.02 0 bottom
LOGO1  SFE_LOGO_NAME.1_INCH  [SFE_LOGO_NAME_.1]  19.56,29.72 0 top
LOGO2  REVISION  [REVISION]  4.32,-17.27 0 top  (outside the outline)
LOGO3  SFE_LOGO_NAME.1_INCH  [SFE_LOGO_NAME_.1@1]  25.53,27.79 0 bottom
LOGO4  OSHW-LOGOS  [OSHW-LOGO-S]  27.4,14.86 0 bottom
LOGO5  OSHW-LOGOS  [OSHW-LOGO-S]  53.31,14.86 0 bottom
LOGO6  REVISION  [REVISION]  30.23,-17.27 0 top  (outside the outline)
LOGO7  SFE_LOGO_NAME.1_INCH  [SFE_LOGO_NAME_.1]  45.47,29.72 0 top
LOGO8  SFE_LOGO_NAME.1_INCH  [SFE_LOGO_NAME_.1@1]  51.43,27.79 0 bottom
LOGO9  OSHW-LOGOS  [OSHW-LOGO-S]  79.21,14.86 0 bottom
LOGO10  REVISION  [REVISION]  56.13,-17.27 0 top  (outside the outline)
LOGO11  SFE_LOGO_NAME.1_INCH  [SFE_LOGO_NAME_.1]  71.37,29.72 0 top
LOGO12  SFE_LOGO_NAME.1_INCH  [SFE_LOGO_NAME_.1@1]  77.34,27.79 0 bottom
LOGO13  OSHW-LOGOS  [OSHW-LOGO-S]  105.12,14.86 0 bottom
LOGO14  REVISION  [REVISION]  82.04,-17.27 0 top  (outside the outline)
LOGO15  SFE_LOGO_NAME.1_INCH  [SFE_LOGO_NAME_.1]  97.28,29.72 0 top
LOGO16  SFE_LOGO_NAME.1_INCH  [SFE_LOGO_NAME_.1@1]  103.25,27.79 0 bottom
LOGO17  OSHW-LOGOS  [OSHW-LOGO-S]  131.03,14.86 0 bottom
LOGO18  REVISION  [REVISION]  107.95,-17.27 0 top  (outside the outline)
LOGO19  SFE_LOGO_NAME.1_INCH  [SFE_LOGO_NAME_.1]  123.19,29.72 0 top
LOGO20  SFE_LOGO_NAME.1_INCH  [SFE_LOGO_NAME_.1@1]  129.16,27.79 0 bottom
LOGO21  OSHW-LOGOS  [OSHW-LOGO-S]  156.94,14.86 0 bottom
LOGO22  REVISION  [REVISION]  133.86,-17.27 0 top  (outside the outline)
LOGO23  SFE_LOGO_NAME.1_INCH  [SFE_LOGO_NAME_.1]  149.1,29.72 0 top
LOGO24  SFE_LOGO_NAME.1_INCH  [SFE_LOGO_NAME_.1@1]  155.07,27.79 0 bottom
LOGO25  OSHW-LOGOS  [OSHW-LOGO-S]  27.4,40.76 0 bottom
LOGO26  REVISION  [REVISION]  4.32,8.64 0 top
LOGO27  SFE_LOGO_NAME.1_INCH  [SFE_LOGO_NAME_.1]  19.56,55.63 0 top
LOGO28  SFE_LOGO_NAME.1_INCH  [SFE_LOGO_NAME_.1@1]  25.53,53.7 0 bottom
LOGO29  OSHW-LOGOS  [OSHW-LOGO-S]  53.31,40.76 0 bottom
LOGO30  REVISION  [REVISION]  30.23,8.64 0 top
LOGO31  SFE_LOGO_NAME.1_INCH  [SFE_LOGO_NAME_.1]  45.47,55.63 0 top
LOGO32  SFE_LOGO_NAME.1_INCH  [SFE_LOGO_NAME_.1@1]  51.43,53.7 0 bottom
LOGO33  OSHW-LOGOS  [OSHW-LOGO-S]  79.21,40.76 0 bottom
LOGO34  REVISION  [REVISION]  56.13,8.64 0 top
LOGO35  SFE_LOGO_NAME.1_INCH  [SFE_LOGO_NAME_.1]  71.37,55.63 0 top
LOGO36  SFE_LOGO_NAME.1_INCH  [SFE_LOGO_NAME_.1@1]  77.34,53.7 0 bottom
LOGO37  OSHW-LOGOS  [OSHW-LOGO-S]  105.12,40.76 0 bottom
LOGO38  REVISION  [REVISION]  82.04,8.64 0 top
LOGO39  SFE_LOGO_NAME.1_INCH  [SFE_LOGO_NAME_.1]  97.28,55.63 0 top
LOGO40  SFE_LOGO_NAME.1_INCH  [SFE_LOGO_NAME_.1@1]  103.25,53.7 0 bottom
LOGO41  OSHW-LOGOS  [OSHW-LOGO-S]  131.03,40.76 0 bottom
LOGO42  REVISION  [REVISION]  107.95,8.64 0 top
LOGO43  SFE_LOGO_NAME.1_INCH  [SFE_LOGO_NAME_.1]  123.19,55.63 0 top
LOGO44  SFE_LOGO_NAME.1_INCH  [SFE_LOGO_NAME_.1@1]  129.16,53.7 0 bottom
LOGO45  OSHW-LOGOS  [OSHW-LOGO-S]  156.94,40.76 0 bottom
LOGO46  REVISION  [REVISION]  133.86,8.64 0 top
LOGO47  SFE_LOGO_NAME.1_INCH  [SFE_LOGO_NAME_.1]  149.1,55.63 0 top
LOGO48  SFE_LOGO_NAME.1_INCH  [SFE_LOGO_NAME_.1@1]  155.07,53.7 0 bottom
LOGO49  OSHW-LOGOS  [OSHW-LOGO-S]  27.4,66.67 0 bottom
LOGO50  REVISION  [REVISION]  4.32,34.54 0 top
LOGO51  SFE_LOGO_NAME.1_INCH  [SFE_LOGO_NAME_.1]  19.56,81.53 0 top
LOGO52  SFE_LOGO_NAME.1_INCH  [SFE_LOGO_NAME_.1@1]  25.53,79.61 0 bottom
LOGO53  OSHW-LOGOS  [OSHW-LOGO-S]  53.31,66.67 0 bottom
LOGO54  REVISION  [REVISION]  30.23,34.54 0 top
LOGO55  SFE_LOGO_NAME.1_INCH  [SFE_LOGO_NAME_.1]  45.47,81.53 0 top
LOGO56  SFE_LOGO_NAME.1_INCH  [SFE_LOGO_NAME_.1@1]  51.43,79.61 0 bottom
LOGO57  OSHW-LOGOS  [OSHW-LOGO-S]  79.21,66.67 0 bottom
LOGO58  REVISION  [REVISION]  56.13,34.54 0 top
LOGO59  SFE_LOGO_NAME.1_INCH  [SFE_LOGO_NAME_.1]  71.37,81.53 0 top
LOGO60  SFE_LOGO_NAME.1_INCH  [SFE_LOGO_NAME_.1@1]  77.34,79.61 0 bottom
LOGO61  OSHW-LOGOS  [OSHW-LOGO-S]  105.12,66.67 0 bottom
LOGO62  REVISION  [REVISION]  82.04,34.54 0 top
LOGO63  SFE_LOGO_NAME.1_INCH  [SFE_LOGO_NAME_.1]  97.28,81.53 0 top
LOGO64  SFE_LOGO_NAME.1_INCH  [SFE_LOGO_NAME_.1@1]  103.25,79.61 0 bottom
LOGO65  OSHW-LOGOS  [OSHW-LOGO-S]  131.03,66.67 0 bottom
LOGO66  REVISION  [REVISION]  107.95,34.54 0 top
LOGO67  SFE_LOGO_NAME.1_INCH  [SFE_LOGO_NAME_.1]  123.19,81.53 0 top
LOGO68  SFE_LOGO_NAME.1_INCH  [SFE_LOGO_NAME_.1@1]  129.16,79.61 0 bottom
LOGO69  OSHW-LOGOS  [OSHW-LOGO-S]  156.94,66.67 0 bottom
LOGO70  REVISION  [REVISION]  133.86,34.54 0 top
LOGO71  SFE_LOGO_NAME.1_INCH  [SFE_LOGO_NAME_.1]  149.1,81.53 0 top
LOGO72  SFE_LOGO_NAME.1_INCH  [SFE_LOGO_NAME_.1@1]  155.07,79.61 0 bottom
LOGO73  OSHW-LOGOS  [OSHW-LOGO-S]  27.4,92.58 0 bottom
LOGO74  REVISION  [REVISION]  4.32,60.45 0 top
LOGO75  SFE_LOGO_NAME.1_INCH  [SFE_LOGO_NAME_.1]  19.56,107.44 0 top
LOGO76  SFE_LOGO_NAME.1_INCH  [SFE_LOGO_NAME_.1@1]  25.53,105.52 0 bottom
LOGO77  OSHW-LOGOS  [OSHW-LOGO-S]  53.31,92.58 0 bottom
LOGO78  REVISION  [REVISION]  30.23,60.45 0 top
LOGO79  SFE_LOGO_NAME.1_INCH  [SFE_LOGO_NAME_.1]  45.47,107.44 0 top
LOGO80  SFE_LOGO_NAME.1_INCH  [SFE_LOGO_NAME_.1@1]  51.43,105.52 0 bottom
LOGO81  OSHW-LOGOS  [OSHW-LOGO-S]  79.21,92.58 0 bottom
LOGO82  REVISION  [REVISION]  56.13,60.45 0 top
LOGO83  SFE_LOGO_NAME.1_INCH  [SFE_LOGO_NAME_.1]  71.37,107.44 0 top
LOGO84  SFE_LOGO_NAME.1_INCH  [SFE_LOGO_NAME_.1@1]  77.34,105.52 0 bottom
LOGO85  OSHW-LOGOS  [OSHW-LOGO-S]  105.12,92.58 0 bottom
LOGO86  REVISION  [REVISION]  82.04,60.45 0 top
LOGO87  SFE_LOGO_NAME.1_INCH  [SFE_LOGO_NAME_.1]  97.28,107.44 0 top
LOGO88  SFE_LOGO_NAME.1_INCH  [SFE_LOGO_NAME_.1@1]  103.25,105.52 0 bottom
LOGO89  OSHW-LOGOS  [OSHW-LOGO-S]  131.03,92.58 0 bottom
LOGO90  REVISION  [REVISION]  107.95,60.45 0 top
LOGO91  SFE_LOGO_NAME.1_INCH  [SFE_LOGO_NAME_.1]  123.19,107.44 0 top
LOGO92  SFE_LOGO_NAME.1_INCH  [SFE_LOGO_NAME_.1@1]  129.16,105.52 0 bottom
LOGO93  OSHW-LOGOS  [OSHW-LOGO-S]  156.94,92.58 0 bottom
LOGO94  REVISION  [REVISION]  133.86,60.45 0 top
LOGO95  SFE_LOGO_NAME.1_INCH  [SFE_LOGO_NAME_.1]  149.1,107.44 0 top
LOGO96  SFE_LOGO_NAME.1_INCH  [SFE_LOGO_NAME_.1@1]  155.07,105.52 0 bottom
PWR  RED  [LED-0603]  29.19,25.19 0 top
PWR1  RED  [LED-0603]  55.1,25.19 0 top
PWR2  RED  [LED-0603]  81.01,25.19 0 top
PWR3  RED  [LED-0603]  106.92,25.19 0 top
PWR4  RED  [LED-0603]  132.82,25.19 0 top
PWR5  RED  [LED-0603]  158.73,25.19 0 top
PWR6  RED  [LED-0603]  29.19,51.1 0 top
PWR7  RED  [LED-0603]  55.1,51.1 0 top
PWR8  RED  [LED-0603]  81.01,51.1 0 top
PWR9  RED  [LED-0603]  106.92,51.1 0 top
PWR10  RED  [LED-0603]  132.82,51.1 0 top
PWR11  RED  [LED-0603]  158.73,51.1 0 top
PWR12  RED  [LED-0603]  29.19,77.01 0 top
PWR13  RED  [LED-0603]  55.1,77.01 0 top
PWR14  RED  [LED-0603]  81.01,77.01 0 top
PWR15  RED  [LED-0603]  106.92,77.01 0 top
PWR16  RED  [LED-0603]  132.82,77.01 0 top
PWR17  RED  [LED-0603]  158.73,77.01 0 top
PWR18  RED  [LED-0603]  29.19,102.92 0 top
PWR19  RED  [LED-0603]  55.1,102.92 0 top
PWR20  RED  [LED-0603]  81.01,102.92 0 top
PWR21  RED  [LED-0603]  106.92,102.92 0 top
PWR22  RED  [LED-0603]  132.82,102.92 0 top
PWR23  RED  [LED-0603]  158.73,102.92 0 top
R1  10k  [0402-TIGHT]  19.06,15.84 0 top
R2  4.7k  [0402-TIGHT]  29.56,26.36 0 top
R3  100k  [0402-TIGHT]  20.76,22.9 90 top
R4  2.2k  [0402-TIGHT]  40.8,22.94 90 top
R5  2.2k  [0402-TIGHT]  34.19,24.58 90 top
R6  10k  [0402-TIGHT]  18.04,22.9 90 top
R7  10k  [0402-TIGHT]  13.04,15.29 0 top
R8  10k  [0402-TIGHT]  15.82,10.78 270 top
R9  100k  [0402-TIGHT]  46.67,22.9 90 top
R10  10k  [0402-TIGHT]  43.95,22.9 90 top
R11  10k  [0402-TIGHT]  38.95,15.29 0 top
R12  10k  [0402-TIGHT]  41.73,10.78 270 top
R13  2.2k  [0402-TIGHT]  14.89,22.94 90 top
R14  2.2k  [0402-TIGHT]  8.29,24.58 90 top
R15  10k  [0402-TIGHT]  44.97,15.84 0 top
R16  4.7k  [0402-TIGHT]  55.47,26.36 0 top
R17  2.2k  [0402-TIGHT]  66.71,22.94 90 top
R18  2.2k  [0402-TIGHT]  60.1,24.58 90 top
R19  100k  [0402-TIGHT]  72.58,22.9 90 top
R20  10k  [0402-TIGHT]  69.86,22.9 90 top
R21  10k  [0402-TIGHT]  64.85,15.29 0 top
R22  10k  [0402-TIGHT]  67.64,10.78 270 top
R23  10k  [0402-TIGHT]  70.87,15.84 0 top
R24  4.7k  [0402-TIGHT]  81.38,26.36 0 top
R25  2.2k  [0402-TIGHT]  92.62,22.94 90 top
R26  2.2k  [0402-TIGHT]  86.01,24.58 90 top
R27  100k  [0402-TIGHT]  98.49,22.9 90 top
R28  10k  [0402-TIGHT]  95.77,22.9 90 top
R29  10k  [0402-TIGHT]  90.76,15.29 0 top
R30  10k  [0402-TIGHT]  93.54,10.78 270 top
R31  10k  [0402-TIGHT]  96.78,15.84 0 top
R32  4.7k  [0402-TIGHT]  107.28,26.36 0 top
R33  2.2k  [0402-TIGHT]  118.53,22.94 90 top
R34  2.2k  [0402-TIGHT]  111.92,24.58 90 top
R35  100k  [0402-TIGHT]  124.4,22.9 90 top
R36  10k  [0402-TIGHT]  121.68,22.9 90 top
R37  10k  [0402-TIGHT]  116.67,15.29 0 top
R38  10k  [0402-TIGHT]  119.45,10.78 270 top
R39  10k  [0402-TIGHT]  122.69,15.84 0 top
R40  4.7k  [0402-TIGHT]  133.19,26.36 0 top
R41  2.2k  [0402-TIGHT]  144.43,22.94 90 top
R42  2.2k  [0402-TIGHT]  137.83,24.58 90 top
R43  100k  [0402-TIGHT]  150.3,22.9 90 top
R44  10k  [0402-TIGHT]  147.58,22.9 90 top
R45  10k  [0402-TIGHT]  142.58,15.29 0 top
R46  10k  [0402-TIGHT]  145.36,10.78 270 top
R47  10k  [0402-TIGHT]  148.6,15.84 0 top
R48  4.7k  [0402-TIGHT]  159.1,26.36 0 top
R49  2.2k  [0402-TIGHT]  14.89,48.85 90 top
R50  2.2k  [0402-TIGHT]  8.29,50.49 90 top
R51  100k  [0402-TIGHT]  20.76,48.8 90 top
R52  10k  [0402-TIGHT]  18.04,48.8 90 top
R53  10k  [0402-TIGHT]  13.04,41.2 0 top
R54  10k  [0402-TIGHT]  15.82,36.69 270 top
R55  10k  [0402-TIGHT]  19.06,41.75 0 top
R56  4.7k  [0402-TIGHT]  29.56,52.27 0 top
R57  2.2k  [0402-TIGHT]  40.8,48.85 90 top
R58  2.2k  [0402-TIGHT]  34.19,50.49 90 top
R59  100k  [0402-TIGHT]  46.67,48.8 90 top
R60  10k  [0402-TIGHT]  43.95,48.8 90 top
R61  10k  [0402-TIGHT]  38.95,41.2 0 top
R62  10k  [0402-TIGHT]  41.73,36.69 270 top
R63  10k  [0402-TIGHT]  44.97,41.75 0 top
R64  4.7k  [0402-TIGHT]  55.47,52.27 0 top
R65  2.2k  [0402-TIGHT]  66.71,48.85 90 top
R66  2.2k  [0402-TIGHT]  60.1,50.49 90 top
R67  100k  [0402-TIGHT]  72.58,48.8 90 top
R68  10k  [0402-TIGHT]  69.86,48.8 90 top
R69  10k  [0402-TIGHT]  64.85,41.2 0 top
R70  10k  [0402-TIGHT]  67.64,36.69 270 top
R71  10k  [0402-TIGHT]  70.87,41.75 0 top
R72  4.7k  [0402-TIGHT]  81.38,52.27 0 top
R73  2.2k  [0402-TIGHT]  92.62,48.85 90 top
R74  2.2k  [0402-TIGHT]  86.01,50.49 90 top
R75  100k  [0402-TIGHT]  98.49,48.8 90 top
R76  10k  [0402-TIGHT]  95.77,48.8 90 top
R77  10k  [0402-TIGHT]  90.76,41.2 0 top
R78  10k  [0402-TIGHT]  93.54,36.69 270 top
R79  10k  [0402-TIGHT]  96.78,41.75 0 top
R80  4.7k  [0402-TIGHT]  107.28,52.27 0 top
R81  2.2k  [0402-TIGHT]  118.53,48.85 90 top
R82  2.2k  [0402-TIGHT]  111.92,50.49 90 top
R83  100k  [0402-TIGHT]  124.4,48.8 90 top
R84  10k  [0402-TIGHT]  121.68,48.8 90 top
R85  10k  [0402-TIGHT]  116.67,41.2 0 top
R86  10k  [0402-TIGHT]  119.45,36.69 270 top
R87  10k  [0402-TIGHT]  122.69,41.75 0 top
R88  4.7k  [0402-TIGHT]  133.19,52.27 0 top
R89  2.2k  [0402-TIGHT]  144.43,48.85 90 top
R90  2.2k  [0402-TIGHT]  137.83,50.49 90 top
R91  100k  [0402-TIGHT]  150.3,48.8 90 top
R92  10k  [0402-TIGHT]  147.58,48.8 90 top
R93  10k  [0402-TIGHT]  142.58,41.2 0 top
R94  10k  [0402-TIGHT]  145.36,36.69 270 top
R95  10k  [0402-TIGHT]  148.6,41.75 0 top
R96  4.7k  [0402-TIGHT]  159.1,52.27 0 top
R97  2.2k  [0402-TIGHT]  14.89,74.76 90 top
R98  2.2k  [0402-TIGHT]  8.29,76.39 90 top
R99  100k  [0402-TIGHT]  20.76,74.71 90 top
R100  10k  [0402-TIGHT]  18.04,74.71 90 top
R101  10k  [0402-TIGHT]  13.04,67.11 0 top
R102  10k  [0402-TIGHT]  15.82,62.6 270 top
R103  10k  [0402-TIGHT]  19.06,67.66 0 top
R104  4.7k  [0402-TIGHT]  29.56,78.18 0 top
R105  2.2k  [0402-TIGHT]  40.8,74.76 90 top
R106  2.2k  [0402-TIGHT]  34.19,76.39 90 top
R107  100k  [0402-TIGHT]  46.67,74.71 90 top
R108  10k  [0402-TIGHT]  43.95,74.71 90 top
R109  10k  [0402-TIGHT]  38.95,67.11 0 top
R110  10k  [0402-TIGHT]  41.73,62.6 270 top
R111  10k  [0402-TIGHT]  44.97,67.66 0 top
R112  4.7k  [0402-TIGHT]  55.47,78.18 0 top
R113  2.2k  [0402-TIGHT]  66.71,74.76 90 top
R114  2.2k  [0402-TIGHT]  60.1,76.39 90 top
R115  100k  [0402-TIGHT]  72.58,74.71 90 top
R116  10k  [0402-TIGHT]  69.86,74.71 90 top
R117  10k  [0402-TIGHT]  64.85,67.11 0 top
R118  10k  [0402-TIGHT]  67.64,62.6 270 top
R119  10k  [0402-TIGHT]  70.87,67.66 0 top
R120  4.7k  [0402-TIGHT]  81.38,78.18 0 top
R121  2.2k  [0402-TIGHT]  92.62,74.76 90 top
R122  2.2k  [0402-TIGHT]  86.01,76.39 90 top
R123  100k  [0402-TIGHT]  98.49,74.71 90 top
R124  10k  [0402-TIGHT]  95.77,74.71 90 top
R125  10k  [0402-TIGHT]  90.76,67.11 0 top
R126  10k  [0402-TIGHT]  93.54,62.6 270 top
R127  10k  [0402-TIGHT]  96.78,67.66 0 top
R128  4.7k  [0402-TIGHT]  107.28,78.18 0 top
R129  2.2k  [0402-TIGHT]  118.53,74.76 90 top
R130  2.2k  [0402-TIGHT]  111.92,76.39 90 top
R131  100k  [0402-TIGHT]  124.4,74.71 90 top
R132  10k  [0402-TIGHT]  121.68,74.71 90 top
R133  10k  [0402-TIGHT]  116.67,67.11 0 top
R134  10k  [0402-TIGHT]  119.45,62.6 270 top
R135  10k  [0402-TIGHT]  122.69,67.66 0 top
R136  4.7k  [0402-TIGHT]  133.19,78.18 0 top
R137  2.2k  [0402-TIGHT]  144.43,74.76 90 top
R138  2.2k  [0402-TIGHT]  137.83,76.39 90 top
R139  100k  [0402-TIGHT]  150.3,74.71 90 top
R140  10k  [0402-TIGHT]  147.58,74.71 90 top
R141  10k  [0402-TIGHT]  142.58,67.11 0 top
R142  10k  [0402-TIGHT]  145.36,62.6 270 top
R143  10k  [0402-TIGHT]  148.6,67.66 0 top
R144  4.7k  [0402-TIGHT]  159.1,78.18 0 top
R145  2.2k  [0402-TIGHT]  14.89,100.67 90 top
R146  2.2k  [0402-TIGHT]  8.29,102.3 90 top
R147  100k  [0402-TIGHT]  20.76,100.62 90 top
R148  10k  [0402-TIGHT]  18.04,100.62 90 top
R149  10k  [0402-TIGHT]  13.04,93.01 0 top
R150  10k  [0402-TIGHT]  15.82,88.5 270 top
R151  10k  [0402-TIGHT]  19.06,93.57 0 top
R152  4.7k  [0402-TIGHT]  29.56,104.08 0 top
R153  2.2k  [0402-TIGHT]  40.8,100.67 90 top
R154  2.2k  [0402-TIGHT]  34.19,102.3 90 top
R155  100k  [0402-TIGHT]  46.67,100.62 90 top
R156  10k  [0402-TIGHT]  43.95,100.62 90 top
R157  10k  [0402-TIGHT]  38.95,93.01 0 top
R158  10k  [0402-TIGHT]  41.73,88.5 270 top
R159  10k  [0402-TIGHT]  44.97,93.57 0 top
R160  4.7k  [0402-TIGHT]  55.47,104.08 0 top
R161  2.2k  [0402-TIGHT]  66.71,100.67 90 top
R162  2.2k  [0402-TIGHT]  60.1,102.3 90 top
R163  100k  [0402-TIGHT]  72.58,100.62 90 top
R164  10k  [0402-TIGHT]  69.86,100.62 90 top
R165  10k  [0402-TIGHT]  64.85,93.01 0 top
R166  10k  [0402-TIGHT]  67.64,88.5 270 top
R167  10k  [0402-TIGHT]  70.87,93.57 0 top
R168  4.7k  [0402-TIGHT]  81.38,104.08 0 top
R169  2.2k  [0402-TIGHT]  92.62,100.67 90 top
R170  2.2k  [0402-TIGHT]  86.01,102.3 90 top
R171  100k  [0402-TIGHT]  98.49,100.62 90 top
R172  10k  [0402-TIGHT]  95.77,100.62 90 top
R173  10k  [0402-TIGHT]  90.76,93.01 0 top
R174  10k  [0402-TIGHT]  93.54,88.5 270 top
R175  10k  [0402-TIGHT]  96.78,93.57 0 top
R176  4.7k  [0402-TIGHT]  107.28,104.08 0 top
R177  2.2k  [0402-TIGHT]  118.53,100.67 90 top
R178  2.2k  [0402-TIGHT]  111.92,102.3 90 top
R179  100k  [0402-TIGHT]  124.4,100.62 90 top
R180  10k  [0402-TIGHT]  121.68,100.62 90 top
R181  10k  [0402-TIGHT]  116.67,93.01 0 top
R182  10k  [0402-TIGHT]  119.45,88.5 270 top
R183  10k  [0402-TIGHT]  122.69,93.57 0 top
R184  4.7k  [0402-TIGHT]  133.19,104.08 0 top
R185  2.2k  [0402-TIGHT]  144.43,100.67 90 top
R186  2.2k  [0402-TIGHT]  137.83,102.3 90 top
R187  100k  [0402-TIGHT]  150.3,100.62 90 top
R188  10k  [0402-TIGHT]  147.58,100.62 90 top
R189  10k  [0402-TIGHT]  142.58,93.01 0 top
R190  10k  [0402-TIGHT]  145.36,88.5 270 top
R191  10k  [0402-TIGHT]  148.6,93.57 0 top
R192  4.7k  [0402-TIGHT]  159.1,104.08 0 top
U1  AP2127K-1.8V  [SOT23-5]  17.18,14 90 top
U2  ENS160  [LGA-9]  17.02,19.56 0 top
U3  BME280  [LGA-8-2.5X2.5]  23.37,19.56 180 top
U4  BME280  [LGA-8-2.5X2.5]  49.28,19.56 180 top
U5  ENS160  [LGA-9]  42.93,19.56 0 top
U6  AP2127K-1.8V  [SOT23-5]  43.09,14 90 top
U7  BME280  [LGA-8-2.5X2.5]  75.18,19.56 180 top
U8  ENS160  [LGA-9]  68.83,19.56 0 top
U9  AP2127K-1.8V  [SOT23-5]  69,14 90 top
U10  BME280  [LGA-8-2.5X2.5]  101.09,19.56 180 top
U11  ENS160  [LGA-9]  94.74,19.56 0 top
U12  AP2127K-1.8V  [SOT23-5]  94.91,14 90 top
U13  BME280  [LGA-8-2.5X2.5]  127,19.56 180 top
U14  ENS160  [LGA-9]  120.65,19.56 0 top
U15  AP2127K-1.8V  [SOT23-5]  120.82,14 90 top
U16  BME280  [LGA-8-2.5X2.5]  152.91,19.56 180 top
U17  ENS160  [LGA-9]  146.56,19.56 0 top
U18  AP2127K-1.8V  [SOT23-5]  146.72,14 90 top
U19  BME280  [LGA-8-2.5X2.5]  23.37,45.47 180 top
U20  ENS160  [LGA-9]  17.02,45.47 0 top
U21  AP2127K-1.8V  [SOT23-5]  17.18,39.91 90 top
U22  BME280  [LGA-8-2.5X2.5]  49.28,45.47 180 top
U23  ENS160  [LGA-9]  42.93,45.47 0 top
U24  AP2127K-1.8V  [SOT23-5]  43.09,39.91 90 top
U25  BME280  [LGA-8-2.5X2.5]  75.18,45.47 180 top
U26  ENS160  [LGA-9]  68.83,45.47 0 top
U27  AP2127K-1.8V  [SOT23-5]  69,39.91 90 top
U28  BME280  [LGA-8-2.5X2.5]  101.09,45.47 180 top
U29  ENS160  [LGA-9]  94.74,45.47 0 top
U30  AP2127K-1.8V  [SOT23-5]  94.91,39.91 90 top
U31  BME280  [LGA-8-2.5X2.5]  127,45.47 180 top
U32  ENS160  [LGA-9]  120.65,45.47 0 top
U33  AP2127K-1.8V  [SOT23-5]  120.82,39.91 90 top
U34  BME280  [LGA-8-2.5X2.5]  152.91,45.47 180 top
U35  ENS160  [LGA-9]  146.56,45.47 0 top
U36  AP2127K-1.8V  [SOT23-5]  146.72,39.91 90 top
U37  BME280  [LGA-8-2.5X2.5]  23.37,71.37 180 top
U38  ENS160  [LGA-9]  17.02,71.37 0 top
U39  AP2127K-1.8V  [SOT23-5]  17.18,65.82 90 top
U40  BME280  [LGA-8-2.5X2.5]  49.28,71.37 180 top
U41  ENS160  [LGA-9]  42.93,71.37 0 top
U42  AP2127K-1.8V  [SOT23-5]  43.09,65.82 90 top
U43  BME280  [LGA-8-2.5X2.5]  75.18,71.37 180 top
U44  ENS160  [LGA-9]  68.83,71.37 0 top
U45  AP2127K-1.8V  [SOT23-5]  69,65.82 90 top
U46  BME280  [LGA-8-2.5X2.5]  101.09,71.37 180 top
U47  ENS160  [LGA-9]  94.74,71.37 0 top
U48  AP2127K-1.8V  [SOT23-5]  94.91,65.82 90 top
U49  BME280  [LGA-8-2.5X2.5]  127,71.37 180 top
U50  ENS160  [LGA-9]  120.65,71.37 0 top
U51  AP2127K-1.8V  [SOT23-5]  120.82,65.82 90 top
U52  BME280  [LGA-8-2.5X2.5]  152.91,71.37 180 top
U53  ENS160  [LGA-9]  146.56,71.37 0 top
U54  AP2127K-1.8V  [SOT23-5]  146.72,65.82 90 top
U55  BME280  [LGA-8-2.5X2.5]  23.37,97.28 180 top
U56  ENS160  [LGA-9]  17.02,97.28 0 top
U57  AP2127K-1.8V  [SOT23-5]  17.18,91.72 90 top
U58  BME280  [LGA-8-2.5X2.5]  49.28,97.28 180 top
U59  ENS160  [LGA-9]  42.93,97.28 0 top
U60  AP2127K-1.8V  [SOT23-5]  43.09,91.72 90 top
U61  BME280  [LGA-8-2.5X2.5]  75.18,97.28 180 top
U62  ENS160  [LGA-9]  68.83,97.28 0 top
U63  AP2127K-1.8V  [SOT23-5]  69,91.72 90 top
U64  BME280  [LGA-8-2.5X2.5]  101.09,97.28 180 top
U65  ENS160  [LGA-9]  94.74,97.28 0 top
U66  AP2127K-1.8V  [SOT23-5]  94.91,91.72 90 top
U67  BME280  [LGA-8-2.5X2.5]  127,97.28 180 top
U68  ENS160  [LGA-9]  120.65,97.28 0 top
U69  AP2127K-1.8V  [SOT23-5]  120.82,91.72 90 top
U70  BME280  [LGA-8-2.5X2.5]  152.91,97.28 180 top
U71  ENS160  [LGA-9]  146.56,97.28 0 top
U72  AP2127K-1.8V  [SOT23-5]  146.72,91.72 90 top
U$1  [#BME_ADR#0]  25.6,21.72 0 bottom
U$2  [#0X53#0]  9.92,13.56 0 bottom
U$3  [#0X52#0]  17.54,13.49 0 bottom
U$4  [##INT##6]  24.61,10.19 90 bottom
U$5  [#ENS_ADR#0]  13.63,15.19 0 bottom
U$6  [#I2C#0]  10.37,22.53 0 bottom
U$7  [ENVIRONMENTAL_COMBO0]  19.59,27.46 0 top
U$8  [#SCL#4]  22.07,10.25 90 bottom
U$9  [#GND#2]  14.45,10.39 90 bottom
U$10  [ENS160_#_BME2800]  19.59,26.07 0 top
U$11  [ENVIRONMENTAL_COMBO0]  19.49,27.48 0 bottom
U$12  [ENS160_#_BME2800]  19.49,26.09 0 bottom
U$13  [DEFAULT0]  9.78,12.23 0 bottom
U$14  [#SDA#3]  19.56,10.37 90 bottom
U$15  [#PWR#0]  29.32,23.99 0 top
U$16  [OPEN#0X770]  23.83,19.94 0 bottom
U$17  [CLOSED#0X760]  24.77,18.53 0 bottom
U$18  [#LED#0]  26.25,24.23 0 bottom
U$19  [#GND#864]  40.4,10.68 90 top
U$20  [QWIIC_4MM]  29.97,15.24 0 top
U$21  [QWIIC_4MM]  9.27,15.24 0 top
U$22  [#3V3#874]  42.94,10.44 90 top
U$23  [#SDA#874]  45.45,10.45 90 top
U$24  [#SCL#875]  48,10.31 90 top